# Allegro board max10_dk_c.brd
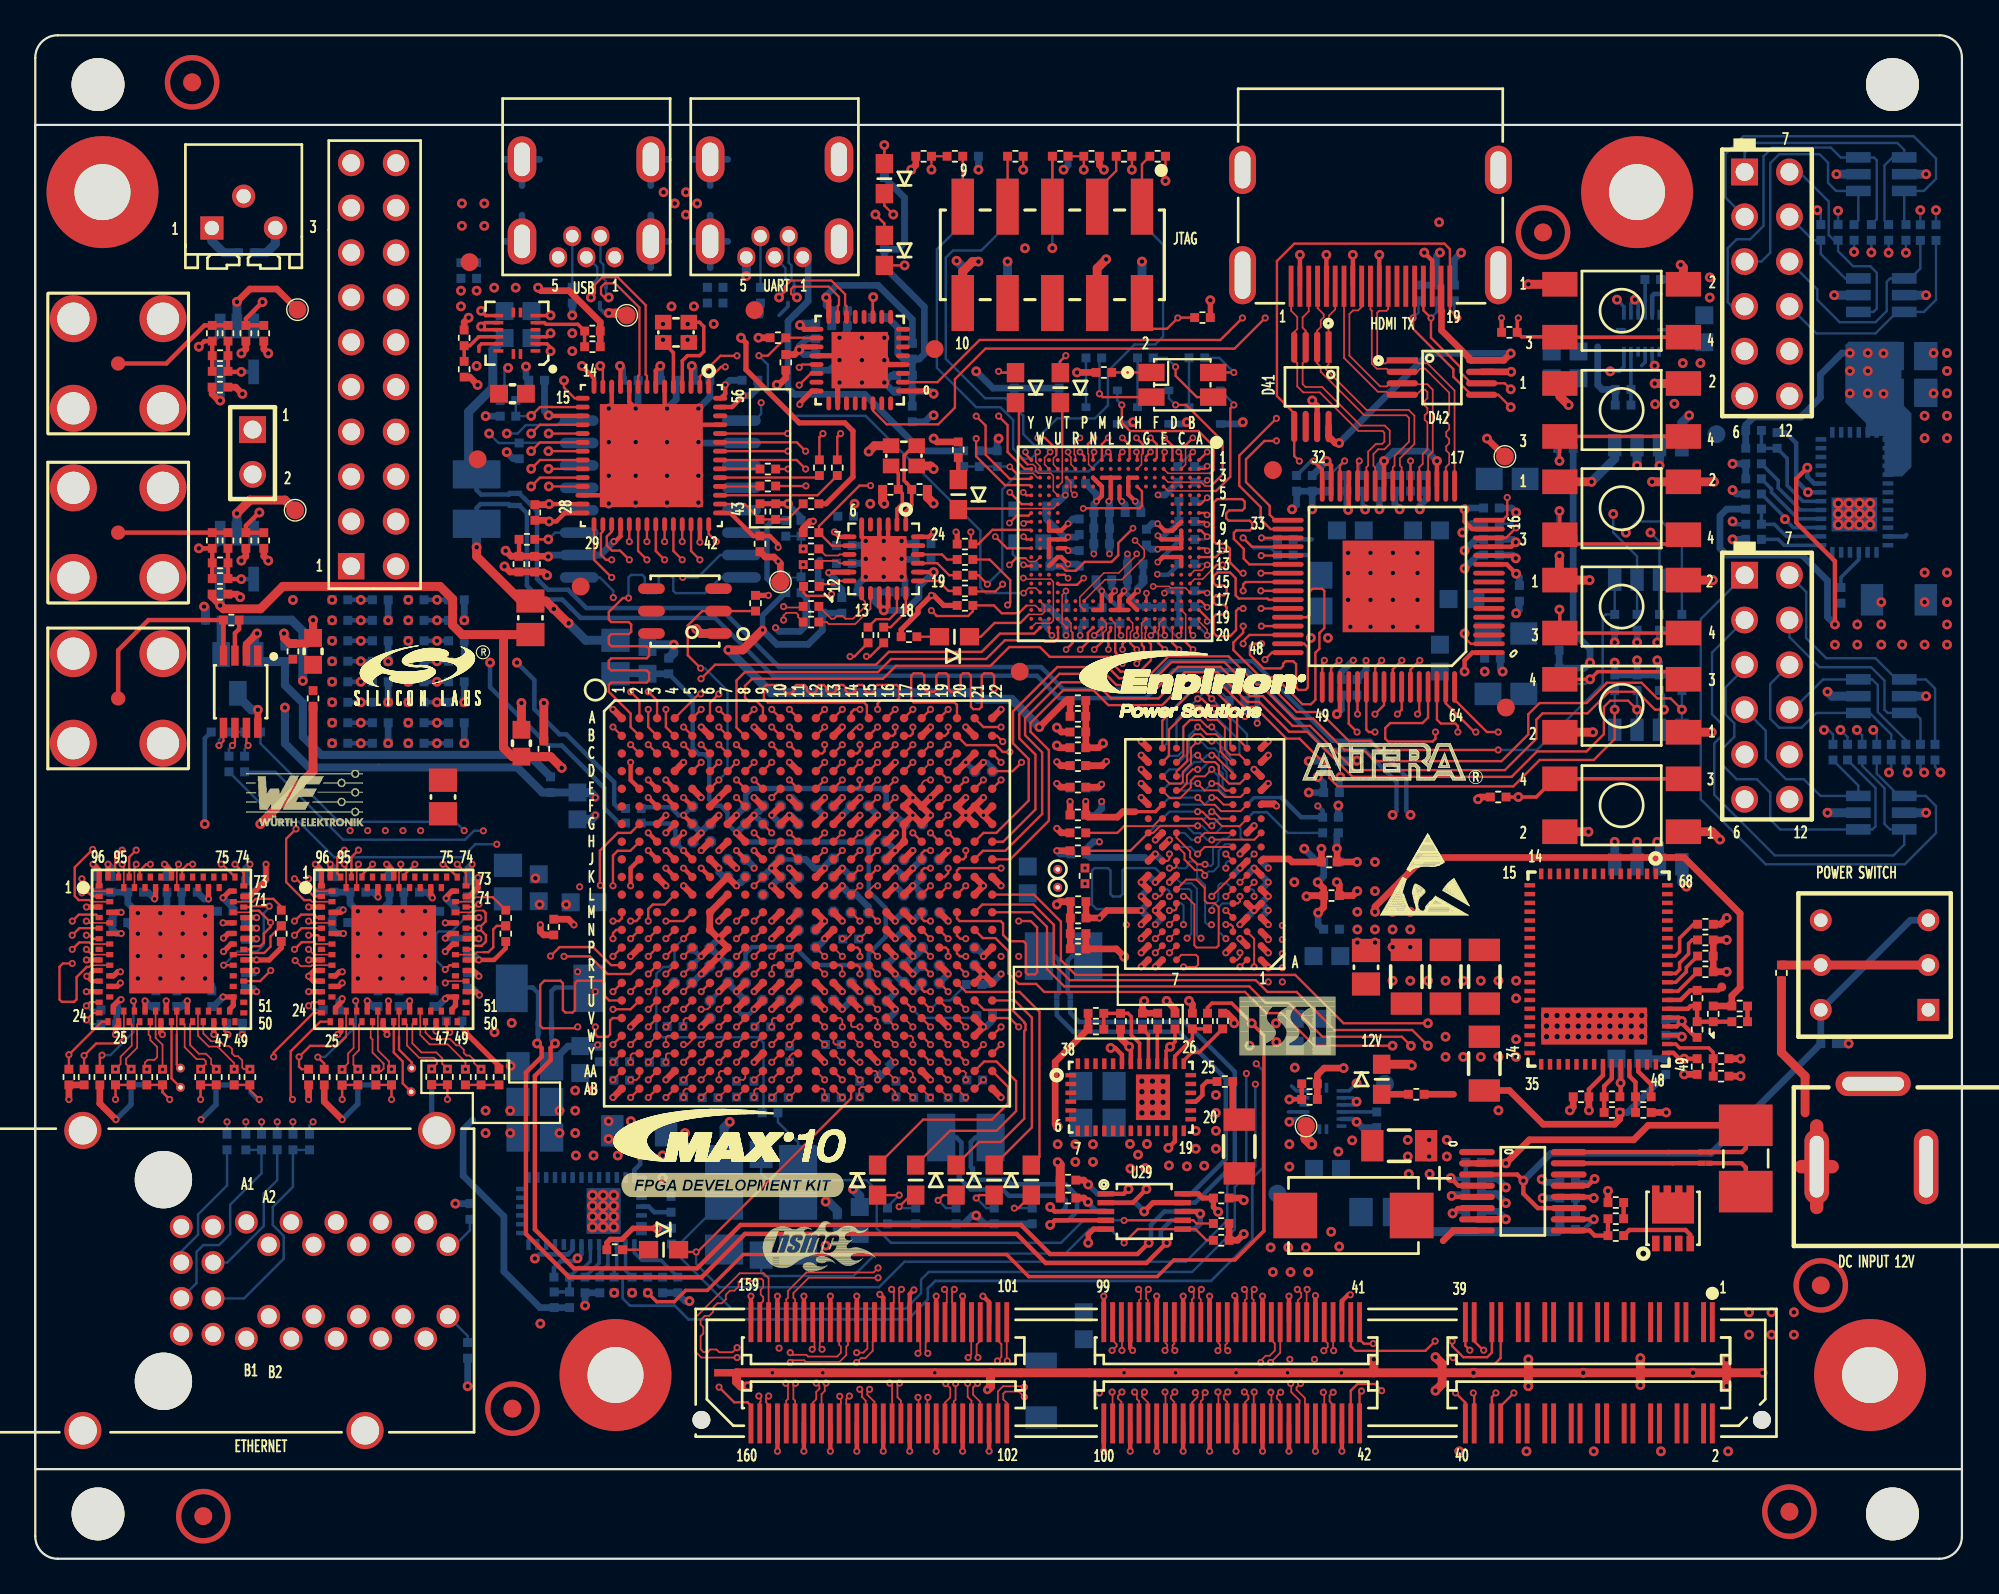
[diagram p0: board, top side]
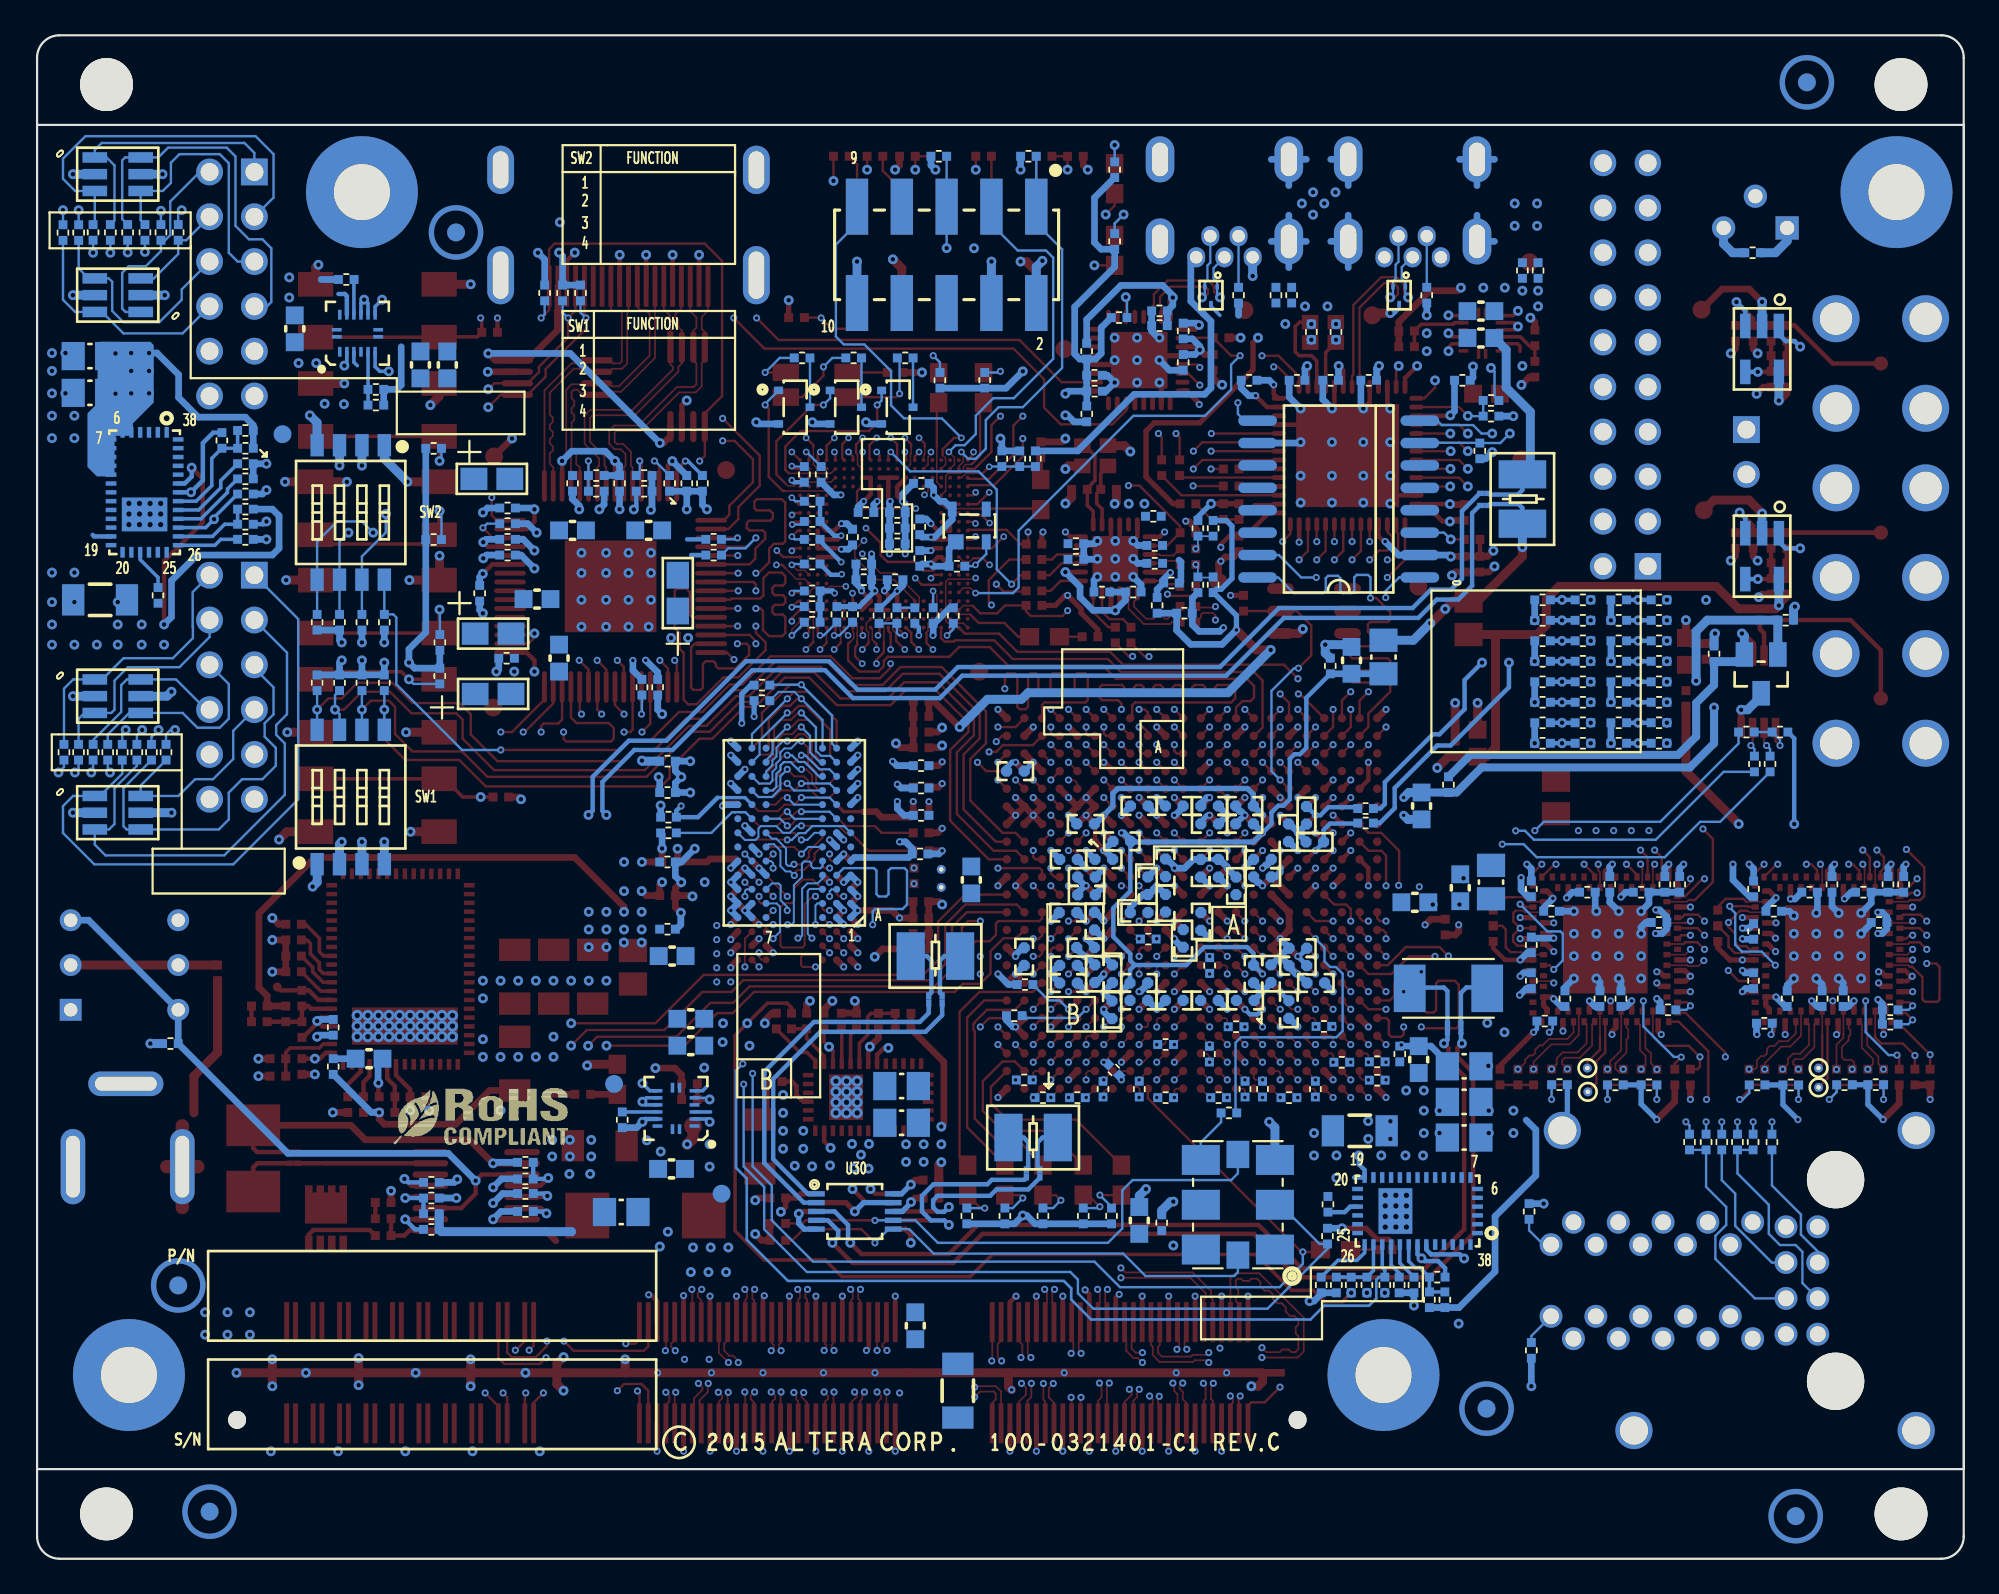
[diagram p1: board, bottom side, seen from below]

Outline 109.22 x 86.36 mm; copper layers: TOP, GND02, ART03, ART04, PWR05, GND06, ART07, ART08, POWER09, BOTTOM. Coordinates in mm from the lower left corner of the outline.
Outline path: rectangle 109.22,81.28 0,5.08 ; 0,81.28 0,85.09 arc(0.37,85.99) 1.27,86.36 107.95,86.36 arc(108.85,85.99) 109.22,85.09 109.22,5.08 ; 0,81.28 0,5.08 ; 0,81.28 109.22,81.28 ; 0,5.08 109.22,5.08 ; 0,5.08 0,1.27 arc(0.37,0.37) 1.27,0 107.95,0 arc(108.85,0.37) 109.22,1.27 109.22,5.08

## Design rules (mm)
net group DIFFPAIR3: nets CLK_DDR3_100_CN CLK_DDR3_100_CP
net group DIFFPAIR4: nets CLK_LVDS_125_CN CLK_LVDS_125_CP
net group DIFFPAIR10: nets FT232_DM FT232_DP
net group DIFFPAIR11: nets TMDS_CLK_N TMDS_CLK_P
net group DIFFPAIR54: nets ENETB_MDI_N3 ENETB_MDI_P3
net group DP_FX2_D_: nets FX2_D_N FX2_D_P
net group PMODA_D0: nets PMODA_D0 PMODA_IO0
net group PMODA_D1: nets PMODA_D1 PMODA_IO1
net group PMODA_D2: nets PMODA_D2 PMODA_IO2
net group PMODA_D3: nets PMODA_D3 PMODA_IO3
net group PMODA_D4: nets PMODA_D4 PMODA_IO4
net group PMODA_D5: nets PMODA_D5 PMODA_IO5
net group PMODA_D6: nets PMODA_D6 PMODA_IO6
net group PMODA_D7: nets PMODA_D7 PMODA_IO7
net group PMODB_D0: nets PMODB_D0 PMODB_IO0
net group PMODB_D1: nets PMODB_D1 PMODB_IO1
net group PMODB_D2: nets PMODB_D2 PMODB_IO2
net group PMODB_D3: nets PMODB_D3 PMODB_IO3
net group PMODB_D4: nets PMODB_D4 PMODB_IO4
net group PMODB_D5: nets PMODB_D5 PMODB_IO5
net group PMODB_D6: nets PMODB_D6 PMODB_IO6
net group PMODB_D7: nets PMODB_D7 PMODB_IO7
net group USB: nets UART_RX UART_TX
net group USB_ADDR: nets USB_ADDR0 USB_ADDR1
net group DIFF_1.0BGA: nets CLK_DDR3_100_N CLK_DDR3_100_P CLK_LVDS_125_N CLK_LVDS_125_P DDR3_CLK_N DDR3_CLK_P DDR3_DQS_N0 DDR3_DQS_P0 HSMC_CLK_IN_N1 HSMC_CLK_IN_N2 HSMC_CLK_IN_P1 HSMC_CLK_IN_P2 HSMC_CLK_OUT_N1 HSMC_CLK_OUT_N2 HSMC_CLK_OUT_P1 HSMC_CLK_OUT_P2 HSMC_RX_D_N0 HSMC_RX_D_N1 HSMC_RX_D_N2 HSMC_RX_D_N3 HSMC_RX_D_N4 HSMC_RX_D_N5 HSMC_RX_D_N6 HSMC_RX_D_N7 HSMC_RX_D_N8 HSMC_RX_D_N9 HSMC_RX_D_N10 HSMC_RX_D_N11 HSMC_RX_D_N12 HSMC_RX_D_N13 HSMC_RX_D_N14 HSMC_RX_D_N15 HSMC_RX_D_N16 HSMC_RX_D_P0 HSMC_RX_D_P1 HSMC_RX_D_P2 HSMC_RX_D_P3 HSMC_RX_D_P4 HSMC_RX_D_P5 HSMC_RX_D_P6 HSMC_RX_D_P7 HSMC_RX_D_P8 HSMC_RX_D_P9 HSMC_RX_D_P10 HSMC_RX_D_P11 HSMC_RX_D_P12 HSMC_RX_D_P13 HSMC_RX_D_P14 HSMC_RX_D_P15 HSMC_RX_D_P16 HSMC_TX_D_N0 HSMC_TX_D_N1 HSMC_TX_D_N2 HSMC_TX_D_N3 HSMC_TX_D_N4 HSMC_TX_D_N5 HSMC_TX_D_N6 HSMC_TX_D_N7 HSMC_TX_D_N8 HSMC_TX_D_N9 HSMC_TX_D_N10 HSMC_TX_D_N11 HSMC_TX_D_N12 HSMC_TX_D_N13 HSMC_TX_D_N14 HSMC_TX_D_N15 HSMC_TX_D_N16 HSMC_TX_D_P0 HSMC_TX_D_P1 HSMC_TX_D_P2 HSMC_TX_D_P3 HSMC_TX_D_P4 HSMC_TX_D_P5 HSMC_TX_D_P6 HSMC_TX_D_P7 HSMC_TX_D_P8 HSMC_TX_D_P9 HSMC_TX_D_P10 HSMC_TX_D_P11 HSMC_TX_D_P12 HSMC_TX_D_P13 HSMC_TX_D_P14 HSMC_TX_D_P15 HSMC_TX_D_P16
net group ENETA_MDI: nets ENETA_MDI_N0 ENETA_MDI_N1 ENETA_MDI_N2 ENETA_MDI_N3 ENETA_MDI_P0 ENETA_MDI_P1 ENETA_MDI_P2 ENETA_MDI_P3
net group ENETB_MDI: nets ENETB_MDI_N0 ENETB_MDI_N1 ENETB_MDI_N2 ENETB_MDI_P0 ENETB_MDI_P1 ENETB_MDI_P2
net group JTAG: nets MAX10_JTAG_EN MAX10_JTAG_TCK MAX10_JTAG_TDI MAX10_JTAG_TDO MAX10_JTAG_TMS
net group QSPI: nets QSPI_CLK QSPI_CSN QSPI_IO0 QSPI_IO1 QSPI_IO2 QSPI_IO3
net group TMD_DATA: nets TMDS_DATA_N0 TMDS_DATA_N1 TMDS_DATA_N2 TMDS_DATA_P0 TMDS_DATA_P1 TMDS_DATA_P2
net group USB_DATA: nets USB_DATA0 USB_DATA1 USB_DATA2 USB_DATA3 USB_DATA4 USB_DATA5 USB_DATA6 USB_DATA7

## Placement (name value [footprint] x y rotation side)
C1  10uF  [0603]  46.74 19.18 90 bottom
C2  0.1uF  [0402]  45.47 19.05 0 bottom
C3  DNI  [0402]  50.13 60.62 270 top
C4  0.1uF  [0402]  48.86 54.8 270 bottom
C5  0.1uF  [0402]  50.33 56.65 90 bottom
C6  0.1uF  [0402]  50.33 57.54 90 bottom
C7  0.1uF  [0402]  45.86 56.43 270 bottom
C8  0.1uF  [0402]  45.86 57.44 270 bottom
C9  0.1uF  [0402]  47.08 54.8 90 bottom
C10  DNI  [0402]  48.48 60.62 90 top
C11  0.1uF  [0402]  43.98 57.25 270 top
C12  0.1uF  [0402]  43.98 56.36 270 top
C13  0.1uF  [0402]  43.98 53.99 270 top
C14  0.1uF  [0402]  43.98 53.1 270 top
C15  1pF  [0402]  23.88 49.71 270 bottom
C16  1pF  [0402]  19.56 53.19 270 bottom
C17  1pF  [0402]  23.88 47.39 270 bottom
C18  1pF  [0402]  23.88 46.23 270 bottom
C19  1pF  [0402]  23.88 52.03 270 bottom
C20  1pF  [0402]  23.88 53.19 270 bottom
C21  1pF  [0402]  23.88 50.87 270 bottom
C22  1pF  [0402]  23.88 48.55 270 bottom
C23  1pF  [0402]  19.56 47.39 270 bottom
C24  1pF  [0402]  23.88 54.36 270 bottom
C25  1pF  [0402]  19.56 50.87 270 bottom
C26  1pF  [0402]  19.56 52.03 270 bottom
C27  1pF  [0402]  19.56 48.55 270 bottom
C28  1pF  [0402]  19.56 46.23 270 bottom
C29  1pF  [0402]  19.56 49.71 270 bottom
C30  1pF  [0402]  19.56 54.36 270 bottom
C31  0.1uF  [0402]  14.6 51.43 180 top
C32  10uF  [0603]  15.75 51.43 90 top
C33  0.47uF  [0402]  10.09 53.21 90 bottom
C34  0.1uF  [0402]  14.15 51.3 0 bottom
C49  0.1uF  [0402]  73.43 42.04 270 bottom
C64  0.1uF  [0402]  59.11 42.16 270 top
C65  4.7uF  [0402]  27.42 56.38 180 top
C66  0.1uF  [0402]  28.31 56.38 0 top
C67  10uF  [1206]  57.02 9.52 90 bottom
C68  10uF  [0603]  59.44 13.21 270 bottom
C69  4.7uF  [0402]  11.97 74.03 270 bottom
C70  DNI  [0402]  24.31 69.21 0 top
C71  10uF  [0603]  79.63 51.05 90 bottom
C72  0.1uF  [0402]  84.13 54.73 180 bottom
C73  0.1uF  [0402]  72.39 60.96 180 bottom
C74  0.1uF  [0402]  74.04 49.4 0 bottom
C75  0.1uF  [0402]  82.61 51.05 270 bottom
C76  10uF  [0603]  80.88 54.4 180 bottom
C77  0.1uF  [0402]  82.55 56.9 90 bottom
C78  0.1uF  [0402]  82.55 57.78 90 bottom
C79  10uF  [0603]  78.87 58.29 180 bottom
C80  0.1uF  [0402]  82.55 59.56 270 bottom
C81  0.1uF  [0402]  78.87 60.96 180 bottom
C82  0.1uF  [0402]  76.2 60.96 180 bottom
C83  10uF  [0603]  74.55 58.29 0 bottom
C84  0.1uF  [0402]  74.8 60.52 270 bottom
C85  0.01uF  [0402]  4.99 26.87 90 bottom
C86  0.01uF  [0402]  6.76 26.87 270 bottom
C87  0.01uF  [0402]  9.8 26.86 90 bottom
C88  0.01uF  [0402]  11.71 26.86 270 bottom
C89  0.1uF  [0402]  4.29 38.23 180 bottom
C90  0.1uF  [0402]  5.69 37.78 90 bottom
C91  0.1uF  [0402]  8.74 37.78 90 bottom
C92  0.1uF  [0402]  6.83 31.75 0 bottom
C93  0.1uF  [0402]  8.03 31.75 0 bottom
C94  0.1uF  [0402]  10.77 36.7 90 bottom
C95  0.1uF  [0402]  11.91 35.56 0 bottom
C96  0.1uF  [0402]  10.01 31.75 0 bottom
C97  0.1uF  [0402]  11.91 37.97 0 bottom
C98  0.1uF  [0402]  3.4 38.23 180 bottom
C99  0.1uF  [0402]  7.47 38.23 180 bottom
C100  0.1uF  [0402]  4.8 36.07 270 bottom
C101  0.1uF  [0402]  11.91 32.77 180 bottom
C102  0.01uF  [0402]  17.84 26.86 90 bottom
C103  0.01uF  [0402]  19.75 26.86 270 bottom
C104  0.01uF  [0402]  22.92 26.87 270 bottom
C105  0.01uF  [0402]  26.29 27.3 0 top
C106  0.1uF  [0402]  22.61 31.75 0 bottom
C107  0.1uF  [0402]  20.62 31.75 0 bottom
C108  0.1uF  [0402]  24.51 34.8 0 bottom
C109  0.1uF  [0402]  19.43 31.75 0 bottom
C110  0.1uF  [0402]  23.37 36.7 90 bottom
C111  0.1uF  [0402]  21.34 37.78 90 bottom
C112  0.1uF  [0402]  16.94 38.23 180 bottom
C113  0.1uF  [0402]  18.29 37.78 90 bottom
C114  0.1uF  [0402]  24.51 32.77 180 bottom
C115  0.1uF  [0402]  20.07 38.23 180 bottom
C116  0.1uF  [0402]  24.51 37.97 0 bottom
C117  0.1uF  [0402]  16.1 38.23 180 bottom
C118  0.1uF  [0402]  17.27 36.07 270 bottom
C119  0.1uF  [0402]  49.28 67.08 90 bottom
C120  4.7uF  [0402]  49.27 66.18 90 bottom
C121  0.1uF  [0402]  45.59 69.9 270 bottom
C122  4.7uF  [0402]  45.59 70.74 270 bottom
C123  0.1uF  [0402]  44.25 67.82 180 bottom
C124  4.7uF  [0402]  44.25 69.6 0 bottom
C125  4.7nF  [0402]  25.02 73.02 0 bottom
C126  0.1uF  [0402]  59.09 60.96 90 bottom
C127  4.7nF  [0402]  38.99 71.63 180 bottom
C128  12pF  [0402]  35.59 69.55 0 bottom
C129  12pF  [0402]  36.98 69.55 180 bottom
C130  0.1uF  [0402]  41.08 59.36 180 top
C131  0.1uF  [0402]  67.23 20.45 90 top
C132  0.1uF  [0402]  33.73 66.8 270 bottom
C133  0.1uF  [0402]  40.51 66.8 90 bottom
C134  0.1uF  [0402]  41.08 57.53 0 top
C135  0.1uF  [0402]  28.32 59.31 0 top
C136  0.1uF  [0402]  37.8 66.8 270 bottom
C137  0.1uF  [0402]  28.42 66.8 90 bottom
C138  0.1uF  [0402]  35.89 66.8 270 bottom
C139  DNI  [0402]  59.46 53.47 180 bottom
C140  0.1uF  [0402]  62.99 57.91 0 bottom
C141  0.1uF  [0402]  62.23 59.31 270 bottom
C142  0.1uF  [0402]  60.45 59.31 90 bottom
C143  0.1uF  [0402]  62.36 55.5 270 bottom
C144  0.1uF  [0402]  60.58 55.5 90 bottom
C145  0.1uF  [0402]  59.18 56.71 180 bottom
C146  0.1uF  [0402]  59.18 58.5 0 bottom
C147  0.1uF  [0402]  62.36 56.39 270 bottom
C148  0.1uF  [0402]  60.45 57.53 90 bottom
C149  0.1uF  [0402]  60.45 58.42 90 bottom
C150  DNI  [0603]  90.4 28.35 180 bottom
C151  0.22uF  [0402]  91.16 26.19 90 top
C152  22nF  [0402]  89.38 26.19 90 top
C153  22uF  [1206]  82.14 28.07 270 top
C154  56pF  [0402]  96.62 31.33 270 top
C155  47uf  [1206]  77.72 32.99 270 top
C156  47uf  [1206]  79.93 32.99 270 top
C157  DNI  [1206]  82.14 32.99 270 top
C158  150uF  [7343P]  74.73 19.46 180 top
C159  1uF  [0402]  87.63 26.19 270 top
C160  1uF  [0402]  92.43 30.12 0 bottom
C161  22uF  [1206]  77.32 23.41 0 top
C162  0.1uF  [0402]  81.53 20.7 270 bottom
C163  0.1uF  [0402]  81.53 19.68 270 bottom
C164  0.01uF  [0402]  89.6 20.19 90 top
C165  0.047uF  [0402]  94.68 33.27 90 top
C166  DNI  [0402]  35.57 15.52 0 bottom
C168  22uF  [1206]  105.65 54.36 180 bottom
C169  47UF  [0805]  106.22 66.09 270 bottom
C170  22uF  [1206]  68.25 23.37 90 top
C171  47UF  [0805]  106.22 68.17 270 bottom
C172  47UF  [0805]  60.21 24.71 270 bottom
C173  47UF  [0805]  60.21 26.79 270 bottom
C174  15pF  [0402]  97.41 63.96 90 bottom
C175  15pF  [0402]  60.13 30.03 270 top
C176  22nF  [0402]  97.41 62.07 270 bottom
C177  22nF  [0402]  62.77 30.48 0 top
C178  10uF  [0603]  34.71 50.93 90 bottom
C179  0.1uF  [0402]  35.91 50.61 0 bottom
C180  10uF  [0603]  27.56 46.23 90 top
C181  0.1uF  [0402]  28.83 45.91 180 top
C182  0.1uF  [C0402_BGA]  53.26 34.13 270 bottom
C183  0.1uF  [0402]  10.47 66.41 90 top
C184  0.1uF  [0402]  10.47 54.68 90 top
C196  10uF  [0603]  30.9 28.3 270 bottom
C197  0.1uF  [0402]  31.97 28.61 180 bottom
C198  10uF  [0603]  28.54 38.04 270 bottom
C199  0.1uF  [C0402_BGA]  39.76 39.64 0 bottom
C200  22uF  [1206]  34.24 24.26 0 bottom
C201  2.2uF  [0603]  73.25 22.1 180 bottom
C202  10uF  [0603]  72.16 29.08 180 bottom
C203  47UF  [0805]  28.32 25.9 270 bottom
C204  47UF  [0805]  28.32 23.88 270 bottom
C205  15pF  [0402]  29.41 14.68 180 bottom
C206  22nF  [0402]  31.17 15.52 0 bottom
C207  30pF  [0402]  10.48 55.56 270 top
C208  30pF  [0402]  10.48 67.31 270 top
C209  0.1uF  [0402]  58.55 21.46 270 top
C210  0.1uF  [0402]  58.55 20.45 270 top
C211  10uF  [0603]  72.16 30.61 180 bottom
C212  0.1uF  [0402]  54.53 62.36 0 bottom
C213  DNI  [0402]  31.58 69.6 270 top
C214  2.2uF  [0603]  27.05 66.04 0 top
C215  10uF  [0603]  27.37 70.72 0 bottom
C216  4.7uF  [C0402_BGA]  42.25 39.14 90 bottom
C217  10uF  [0603]  27.37 69.2 0 bottom
C218  2.2uF  [0603]  94.62 69.72 270 bottom
C219  1.0UF  [C0402_BGA]  45.25 37.16 90 bottom
C220  1.0UF  [C0402_BGA]  44.25 35.16 270 bottom
C221  1.0UF  [C0402_BGA]  46.25 38.15 270 bottom
C222  1.0UF  [C0402_BGA]  43.26 39.14 90 bottom
C223  1.0UF  [C0402_BGA]  46.75 36.63 0 bottom
C224  1.0UF  [C0402_BGA]  45.25 39.17 90 bottom
C225  1.0UF  [C0402_BGA]  43.25 36.13 270 bottom
C226  0.1uF  [C0402_BGA]  40.77 41.66 180 bottom
C227  0.1uF  [C0402_BGA]  47.73 40.67 180 bottom
C228  0.1uF  [C0402_BGA]  46.76 32.64 0 bottom
C229  0.1uF  [C0402_BGA]  40.26 33.15 90 bottom
C230  1.0UF  [C0402_BGA]  41.25 38.14 90 bottom
C231  DNI  [0402]  90.01 66.29 270 bottom
C232  0.1uF  [C0402_BGA]  48.29 31.11 270 bottom
C233  0.1uF  [C0402_BGA]  49.78 41.66 180 bottom
C234  0.1uF  [C0402_BGA]  40.77 42.67 180 bottom
C235  0.1uF  [C0402_BGA]  38.26 31.13 90 bottom
C236  0.1uF  [0402]  59.11 44.96 270 bottom
C237  0.1uF  [0402]  73.48 43.43 90 bottom
C238  0.1uF  [0402]  59.11 44.96 90 top
C239  0.1uF  [0402]  59.11 43.69 270 bottom
C240  0.1uF  [0402]  73.48 37.59 270 top
C241  0.1uF  [0402]  59.11 43.74 90 top
C242  DNI  [0402]  72.24 26.04 270 top
C246  0.1uF  [C0402_BGA]  48.26 33.16 90 bottom
C247  0.1uF  [C0402_BGA]  49.26 33.16 270 bottom
C248  0.1uF  [C0402_BGA]  50.75 32.63 180 bottom
C249  0.1uF  [C0402_BGA]  49.28 36.14 270 bottom
C250  0.1uF  [C0402_BGA]  50.75 33.63 180 bottom
C251  0.1uF  [C0402_BGA]  49.78 34.65 180 bottom
C255  10uF  [0603]  85.96 67.68 270 bottom
C256  10uF  [0603]  87.49 67.68 270 bottom
C308  1.0UF  [C0402_BGA]  44.75 42.67 0 bottom
C309  0.1uF  [C0402_BGA]  46.74 42.67 180 bottom
C310  0.1uF  [C0402_BGA]  42.75 42.67 0 bottom
C311  1.0UF  [C0402_BGA]  40.73 31.65 180 bottom
C312  1.0UF  [C0402_BGA]  42.76 31.65 180 bottom
C313  0.1uF  [C0402_BGA]  37.74 34.61 0 bottom
C314  1uF  [C0402_BGA]  38.28 41.15 90 bottom
C315  10uF  [0603]  30.73 42.67 270 bottom
C316  0.1uF  [C0402_BGA]  39.76 38.65 180 bottom
C318  1pF  [C0402-BGA]  37.26 42.15 270 bottom
C319  1pF  [C0402-BGA]  36.78 40.63 0 bottom
C324  DNI  [0402]  59.11 48.64 90 top
C325  0.1uF  [0402]  59.11 45.97 270 top
C326  0.1uF  [0402]  59.16 39.95 90 bottom
C327  0.1uF  [0402]  73.36 39.5 90 top
C328  0.1uF  [C0402_BGA]  39.27 33.16 90 bottom
C329  0.1uF  [0402]  59.12 37.25 90 top
C330  DNI  [0402]  59.12 34.57 270 top
C331  0.1uF  [C0402_BGA]  53.76 44.65 180 bottom
C334  10uF  [0603]  73.22 34.16 0 bottom
C335  10uF  [0603]  56.26 38.48 90 bottom
C340  0.1uF  [C0402_BGA]  46.76 31.65 0 bottom
C341  10uF  [0603]  31.11 37.21 180 bottom
C342  0.1uF  [C0402_BGA]  37.74 33.62 0 bottom
C343  1.0UF  [C0402_BGA]  42.75 41.66 180 bottom
C344  1.0UF  [C0402_BGA]  36.73 32.64 180 bottom
C345  1.0UF  [C0402_BGA]  44.75 31.65 0 bottom
C346  1.0UF  [C0402_BGA]  49.73 37.63 0 bottom
C347  1.0UF  [C0402_BGA]  49.73 38.64 0 bottom
C348  1.0UF  [C0402_BGA]  50.75 39.64 0 bottom
C349  1.0UF  [C0402_BGA]  48.75 39.65 180 bottom
C350  1.0UF  [C0402_BGA]  50.77 36.63 0 bottom
C351  1.0UF  [0402]  73.48 45.21 270 bottom
C352  1.0UF  [0402]  73.48 35.69 270 bottom
C353  1.0UF  [0402]  59.11 42.14 90 bottom
C354  1.0UF  [0402]  73.48 39.5 270 bottom
C355  0.1uF  [0402]  44.18 53.6 90 bottom
D1  BLUE LED  [BLUE_LED_0603]  76.33 27.18 90 top
D2  GREEN_LED  [LED_0603]  35.62 17.52 0 top
D13  GREEN_LED  [LED_0603]  48.13 74.17 270 top
D14  GREEN_LED  [LED_0603]  48.13 78.23 270 top
D15  GREEN_LED  [LED_0603]  56.46 21.46 90 top
D16  GREEN_LED  [LED_0603]  54.36 21.46 90 top
D17  GREEN_LED  [LED_0603]  52.2 21.46 90 top
D18  GREEN_LED  [LED_0603]  49.91 21.46 90 top
D19  GREEN_LED  [LED_0603]  47.75 21.46 90 top
D20  GREEN_LED  [LED_0603]  52.11 52.27 0 top
D21  GREEN_LED  [LED_0603]  58.11 66.38 270 top
D22  GREEN_LED  [LED_0603]  55.57 66.38 270 top
D23  GREEN_LED  [LED_0603]  52.32 60.32 270 top
D41  82401646  [WURTH_MSOP8]  72.34 66.43 180 top
D42  82401646  [WURTH_MSOP8]  79.75 66.96 270 top
J1  SMA  [SMA_LTI-SASF546-P26-X1]  4.7 48.77 180 top
J2  HSMC  [SAMTEC_QSHDP120CUSTOM]  68.07 10.54 180 top
J4  2x6 PMOD Connector  [HDR2X6_100MIL]  96.9 55.75 0 top
J5  2x6 PMOD Connector  [HDR2X6_100MIL]  96.9 78.61 0 top
J7  CON2  [HDR2X1_100MIL]  12.32 64.01 270 top
J8  685119134923  [HDMI-19PIN]  75.69 72.14 270 top
J11  USB MINI-B  [WURTH_USB_MINI-B]  41.91 74.68 180 top
J12  USB MINI-B  [WURTH_USB_MINI-B]  31.24 74.68 180 top
J13  DNI  [HDR2X5_100MIL_SMT]  60.2 73.91 270 bottom
J14  2X5_100mil  [HDR2X5_100MIL_SMT]  55.12 73.91 270 top
J15  DC Input Jack 2.0 mm  [JACK-DC_2MM]  107.19 22.22 270 top
J18  SMA  [SMA_LTI-SASF546-P26-X1]  4.7 58.17 90 top
J19  SMA  [SMA_LTI-SASF546-P26-X1]  4.7 67.75 0 top
J20  2x10 Header  [HDR2X10_100MIL]  17.91 56.26 90 top
L1  BLM15AG221SN1  [0402]  45.94 59.09 270 bottom
L2  10uH  [0806]  83.37 49.02 90 bottom
L3  10uH  [0806]  83.37 52.44 90 bottom
L4  10uH  [0806]  83.44 61.21 90 bottom
L5  10uH  [0806]  72.9 54.74 0 bottom
L6  742792022  [0805]  32.89 51.11 180 bottom
L7  742792022  [0805]  28.07 53.34 0 top
L8  742792022  [0805]  28.32 27.91 270 bottom
L9  742792022  [0805]  26.8 38.36 0 bottom
L10  BLM15AG221SN1  [0402]  15.75 48.77 0 top
L11  742792022  [0805]  23.11 43.18 0 top
L12  BLM15AG221SN1  [0402]  29.39 35.81 0 top
LED1  RGB_LED_HSMF_C118  [HSMF-C118]  65.02 66.55 180 top
NOREF  -  [unnamed]  83.37 48.25 180 top
NOREF#2  -  [unnamed#2]  104.01 10.41 90 top
NOREF#3  -  [unnamed]  99.44 2.67 180 top
NOREF#4  -  [#3]  -406.93 -189.44 0 top
NOREF#5  -  [unnamed#2]  105.28 83.57 180 top
NOREF#6  -  [unnamed]  40.77 70.78 180 top
NOREF#7  -  [unnamed]  85.47 75.18 180 top
NOREF#8  -  [unnamed]  27.05 8.51 180 top
NOREF#9  -  [unnamed]  24.62 73.5 180 top
NOREF#10  -  [#3]  -393.69 -171.48 0 top
NOREF#11  -  [unnamed#2]  3.56 2.54 180 top
NOREF#12  -  [unnamed#2]  3.56 83.57 180 top
NOREF#13  -  [unnamed]  55.81 50.28 180 top
NOREF#14  -  [unnamed#2]  32.89 10.41 90 top
NOREF#15  -  [unnamed#2]  90.81 77.47 270 top
NOREF#16  -  [unnamed#2]  105.28 2.54 180 top
NOREF#17  -  [unnamed]  70.16 61.71 180 top
NOREF#18  -  [unnamed]  9.52 2.41 180 top
NOREF#19  -  [unnamed#2]  3.81 77.47 180 top
NOREF#20  -  [unnamed]  8.89 83.69 180 top
NOREF#21  -  [#3]  0 5.08 90 top
NOREF#22  -  [unnamed]  30.92 55.11 180 top
NOREF#23  -  [unnamed]  25.07 62.32 180 top
NOREF#24  -  [#3]  0 81.28 0 top
NOREF#25  -  [unnamed]  101.22 15.49 180 top
NOREF#26  -  [unnamed]  50.98 68.57 180 top
NOREF#27  -  [unnamed]  70.41 20.69 0 bottom
NOREF#28  -  [unnamed]  9.52 2.41 0 bottom
NOREF#29  -  [unnamed]  76.51 26.92 0 bottom
NOREF#30  -  [unnamed]  95.31 63.75 0 bottom
NOREF#31  -  [unnamed]  99.44 2.67 0 bottom
NOREF#32  -  [unnamed]  27.05 8.51 0 bottom
NOREF#33  -  [unnamed]  8.89 83.69 0 bottom
NOREF#34  -  [unnamed]  85.47 75.18 0 bottom
NOREF#35  -  [unnamed]  101.22 15.49 0 bottom
POT1  500  [POTTATH]  10.01 75.44 0 top
Q1  NDS7002A  [SOT23]  60.45 65.28 180 bottom
Q2  NDS7002A  [SOT23]  63.37 65.28 180 bottom
Q3  NDS7002A  [SOT23]  66.29 65.28 180 bottom
R1  49.9  [0402]  53.21 32.55 90 bottom
R2  49.9  [0402]  53.82 30.78 90 bottom
R6  10K  [0402]  52.7 57.52 270 top
R7  4.7k  [0402]  36.07 18.29 180 bottom
R8  10K  [0402]  52.7 54.04 270 top
R10  4.7k  [0402]  43.98 58.17 270 top
R15  10  [0402]  21.59 49.71 90 bottom
R16  10  [0402]  17.27 53.19 90 bottom
R17  10  [0402]  21.59 47.39 90 bottom
R18  10  [0402]  21.59 46.23 90 bottom
R19  10  [0402]  21.59 52.03 90 bottom
R20  10  [0402]  21.59 53.19 90 bottom
R21  10  [0402]  21.59 50.87 90 bottom
R22  10  [0402]  21.59 48.55 90 bottom
R23  10  [0402]  17.27 47.39 90 bottom
R24  10  [0402]  21.59 54.36 90 bottom
R25  10  [0402]  17.27 50.87 90 bottom
R26  10  [0402]  17.27 52.03 90 bottom
R27  10  [0402]  17.27 48.55 90 bottom
R28  10  [0402]  17.27 46.23 90 bottom
R29  10  [0402]  17.27 49.71 90 bottom
R30  10  [0402]  17.27 54.36 90 bottom
R31  DNI  [0402]  10.41 46.86 90 bottom
R33  100  [0402]  42.75 33.63 180 bottom
R34  0  [0402]  12.32 46.86 90 bottom
R35  0  [0402]  11.11 53.21 270 top
R36  0  [0402]  10.98 45.05 0 bottom
R37  0  [0402]  11.87 45.05 0 bottom
R38  240  [0402]  59.11 41.15 270 top
R39  240  [0402]  73.43 41.15 270 bottom
R40  1.00K  [0402]  59.11 47.75 270 top
R41  100  [0402]  59.51 38.71 0 top
R42  1.00K  [0402]  59.11 46.86 90 top
R43  2.0K  [0402]  27.87 57.78 270 top
R44  10K  [0402]  78.29 26.33 90 top
R45  49.9  [0402]  32.85 17.52 90 top
R46  2.0K  [0402]  79.43 71.75 0 bottom
R47  2.0K  [0402]  78.41 71.75 0 bottom
R48  10.0K  [0402]  80.45 71.75 0 bottom
R49  DNI  [0402]  74.93 49.4 180 bottom
R51  887 1%  [0402]  82.55 58.67 270 bottom
R52  100  [0402]  46.23 35.13 270 bottom
R53  2.0K  [0402]  70.87 56.9 270 bottom
R54  2.0K  [0402]  77.52 60.52 90 bottom
R55  DNI  [0402]  77.52 61.4 270 bottom
R56  DNI  [0402]  65.28 56.39 270 bottom
R57  2.0K  [0402]  70.87 57.78 270 bottom
R58  2.0K  [0402]  74.8 61.4 90 bottom
R59  4.7k  [0402]  4.17 30.3 90 bottom
R60  4.7k  [0402]  1.91 27.3 180 top
R61  4.7k  [0402]  4.17 31.11 90 bottom
R62  4.7k  [0402]  2.77 27.3 180 top
R63  49.9  [0402]  4.55 27.3 180 top
R64  49.9  [0402]  5.44 27.3 180 top
R65  49.9  [0402]  6.32 27.3 180 top
R66  49.9  [0402]  7.21 27.3 180 top
R67  49.9  [0402]  9.37 27.3 180 top
R68  49.9  [0402]  10.26 27.3 180 top
R69  49.9  [0402]  11.28 27.3 180 top
R70  49.9  [0402]  12.17 27.3 180 top
R71  4.99K  [0402]  3.66 27.3 0 top
R72  4.7k  [0402]  11.3 30.35 270 bottom
R73  22.0  [0402]  41.66 25.27 90 bottom
R74  22.0  [0402]  47.21 52.36 0 top
R75  0  [0402]  13.94 36.32 180 top
R76  DNI  [0402]  13.94 35.43 0 top
R77  22.0  [0402]  48.1 52.36 0 top
R78  22.0  [0402]  52.7 55.75 90 top
R79  22.0  [0402]  52.7 56.64 90 top
R80  DNI  [0402]  45.73 54.04 180 bottom
R81  0  [0402]  44.91 55.31 270 bottom
R82  4.7k  [0402]  15.49 27.3 180 top
R83  4.7k  [0402]  16.76 31.11 90 bottom
R84  49.9  [0402]  17.39 27.29 180 top
R85  49.9  [0402]  18.29 27.3 180 top
R86  49.9  [0402]  19.3 27.3 180 top
R87  49.9  [0402]  20.19 27.3 180 top
R88  49.9  [0402]  22.47 27.32 180 top
R89  49.9  [0402]  23.36 27.31 180 top
R90  49.9  [0402]  24.38 27.3 180 top
R91  49.9  [0402]  25.27 27.3 180 top
R92  4.99K  [0402]  16.38 27.3 0 top
R93  4.7k  [0402]  23.75 30.48 270 bottom
R94  DNI  [0402]  53.26 27.14 270 bottom
R95  DNI  [0402]  41.25 30.16 90 bottom
R96  0  [0402]  26.67 36.32 180 top
R97  DNI  [0402]  26.67 35.43 0 top
R98  DNI  [0402]  27.43 62.8 0 bottom
R99  2.0K  [0402]  60.01 68.07 90 bottom
R100  1K  [0402]  62.93 68.07 90 bottom
R101  0  [0402]  49.71 64.9 0 bottom
R102  DNI  [0402]  49.72 68.45 0 bottom
R103  0  [0402]  42.55 67.82 180 top
R104  1K  [0402]  65.85 68.07 90 bottom
R105  4.7k  [0402]  42.1 69.21 90 top
R106  1K  [0402]  60.58 67.25 90 top
R107  DNI  [0402]  41.11 71.63 0 bottom
R108  1M  [0402]  24.13 73.02 180 bottom
R109  270  [0402]  48.13 74.68 0 bottom
R110  270  [0402]  48.13 78.74 0 bottom
R111  10K  [0402]  47.88 70.36 90 bottom
R112  0  [0402]  26.8 65.66 90 bottom
R113  DNI  [0402]  30.44 71.63 180 bottom
R114  1M  [0402]  38.1 71.63 0 bottom
R115  100K  [0402]  57.07 56.26 270 bottom
R116  2.0K  [0402]  64.77 61.47 0 bottom
R117  2.0K  [0402]  26.8 64.77 270 bottom
R118  0  [0402]  45.47 61.85 0 top
R119  0  [0402]  44.45 61.85 0 top
R120  0  [0402]  41.53 61.77 270 top
R121  0  [0402]  41.53 60.81 270 top
R122  10.0K  [0402]  43.98 59.8 270 top
R123  20.0K  [0402]  41.97 59.36 0 top
R124  1.00K  [0402]  53.02 79.5 90 bottom
R125  1.00K  [0402]  58.1 79.5 90 bottom
R126  10.0K  [0402]  65.28 53.97 270 bottom
R127  10.0K  [0402]  65.28 53.09 270 bottom
R128  1.00K  [0402]  65.72 61.47 0 bottom
R129  10.0K  [0402]  65.28 59.94 270 bottom
R130  10.0K  [0402]  65.28 58.8 270 bottom
R131  1.00K  [0402]  65.28 57.78 270 bottom
R132  1.00K  [0402]  58.42 53.47 0 bottom
R133  1.00K  [0402]  57.28 53.47 180 bottom
R134  1.00K  [0402]  62.99 53.53 180 bottom
R135  1.00K  [0402]  63.88 53.53 180 bottom
R136  DNI  [0402]  60.48 53.47 0 bottom
R137  1.00K  [0402]  61.49 53.47 180 bottom
R138  1.00K  [0402]  66.17 70.36 270 top
R139  1.00K  [0402]  59.88 79.5 90 top
R140  1.00K  [0402]  50.36 79.5 270 top
R141  49.9  [0402]  56.52 19.43 0 bottom
R142  10K  [0402]  93.34 49.66 0 bottom
R143  10K  [0402]  92.08 49.66 0 bottom
R144  49.9  [0402]  54.36 19.43 0 bottom
R145  10K  [0402]  90.81 49.66 0 bottom
R146  10K  [0402]  86.39 50.04 0 bottom
R147  10K  [0402]  89.53 49.66 0 bottom
R148  10K  [0402]  86.39 51.94 180 bottom
R149  49.9  [0402]  52.2 19.43 0 bottom
R150  10K  [0402]  86.74 57.78 270 bottom
R151  49.9  [0402]  49.91 19.43 0 bottom
R152  10K  [0402]  86.74 62.94 270 bottom
R153  49.9  [0402]  48.31 19.43 0 bottom
R154  10K  [0402]  89.53 53.09 180 bottom
R155  0  [0402]  73.36 60.96 0 bottom
R156  10K  [0402]  90.81 53.09 180 bottom
R157  10K  [0402]  92.08 53.09 180 bottom
R158  10K  [0402]  93.34 53.09 180 bottom
R159  0  [0402]  71.5 60.96 0 bottom
R160  10K  [0402]  82.93 43.18 270 top
R161  150  [0402]  49.53 52.27 90 top
R162  10K  [0402]  83.57 69.52 270 top
R163  DNI  [0402]  92.43 27.9 0 bottom
R164  560  [0402]  89.38 25.3 90 top
R165  10.0K  [0402]  95.57 27.36 90 top
R166  4.75K  [0402]  91.16 25.3 270 top
R167  22.0  [0402]  43.99 55.12 90 top
R168  75K  [0402]  95.12 30.89 180 top
R169  10.0K  [0402]  94.21 27.9 0 top
R170  10.0K  [0402]  96.62 30.44 90 top
R171  4.02K  [0402]  95.57 28.35 270 top
R172  22.0  [0402]  52.7 54.86 270 top
R174  DNI  [0402]  94.21 31.78 180 top
R176  13.3K  [0402]  94.21 30 180 top
R177  30K  [0402]  94.68 35.08 270 top
R178  68.1K  [0402]  94.68 34.16 90 top
R179  0  [0402]  94.68 35.97 90 top
R181  140K  [0402]  98.99 33.21 180 top
R184  10.0K  [0402]  97.41 60.36 90 bottom
R185  DNI  [0402]  97.41 59.5 90 bottom
R186  10.0K  [0402]  64.61 30.48 180 top
R187  1.00K  [0402]  59.12 35.43 90 top
R188  0.1  [1210]  25.02 60.07 270 bottom
R189  DNI  [0402]  65.6 30.48 180 top
R190  0  [0402]  97.41 58.64 270 bottom
R191  0  [0402]  66.45 30.48 0 top
R192  200k  [0402]  97.41 62.95 90 bottom
R193  200k  [0402]  60.13 30.92 270 top
R194  0  [0402]  97.41 57.78 270 bottom
R195  59.0K  [0402]  98.74 63.39 180 bottom
R196  0  [0402]  67.31 30.48 0 top
R197  84.5K  [0402]  61.52 30.47 180 top
R198  DNI  [0402]  97.41 61.21 270 bottom
R199  DNI  [0402]  63.63 30.48 0 top
R200  560  [0402]  102.36 54.61 0 bottom
R201  560  [0402]  67.44 27.05 270 top
R204  DNI  [0402]  24.51 11.81 0 bottom
R205  DNI  [0402]  24.64 19.68 180 bottom
R206  49.9  [0402]  12.83 23.62 180 bottom
R207  49.9  [0402]  10.87 23.62 180 bottom
R208  49.9  [0402]  14.6 23.62 180 bottom
R209  49.9  [0402]  13.72 23.62 180 bottom
R210  1.00K  [0402]  59.12 36.32 270 top
R211  200  [0402]  104.39 45.72 180 bottom
R212  0.1  [1210]  58.29 34.16 180 bottom
R213  0  [0402]  31.58 68.71 270 top
R214  0  [0402]  90.01 65.4 270 bottom
R215  0  [0402]  72.24 26.92 270 top
R216  200  [0402]  103.56 45.72 180 bottom
R217  200  [0402]  102.74 45.72 180 bottom
R218  200  [0402]  101.91 45.72 180 bottom
R219  200  [0402]  107.7 45.72 180 bottom
R220  200  [0402]  106.87 45.72 180 bottom
R221  20.0K  [0402]  53.52 62.36 180 bottom
R222  10.0K  [0402]  52.63 62.36 180 bottom
R223  200  [0402]  105.22 45.72 180 bottom
R224  10.0K  [0402]  32.82 15.52 180 bottom
R225  .009  [WSL2010]  29.21 32.33 0 bottom
R226  DNI  [0402]  33.83 15.52 180 bottom
R227  10.0K  [0402]  76.05 24.88 180 bottom
R228  0  [0402]  34.72 15.52 0 bottom
R229  200k  [0402]  30.29 14.68 180 bottom
R230  0  [0402]  36.42 15.52 0 bottom
R231  332K  [0402]  29.84 15.96 270 bottom
R232  DNI  [0402]  32 15.52 0 bottom
R233  2.0K  [0402]  68.13 49.52 270 bottom
R234  560  [0402]  36.04 20.09 180 bottom
R235  4.7k  [0402]  67.23 19.01 270 top
R236  4.7k  [0402]  67.23 18.05 270 top
R237  150  [0402]  58.04 66.8 0 bottom
R238  150  [0402]  55.5 66.8 0 bottom
R239  150  [0402]  52.32 62.86 0 top
R240  1  [0402]  29.21 43.88 180 bottom
R241  DNI  [0402]  10.03 57.72 180 top
R242  DNI  [0402]  10.03 69.47 180 top
R243  10.0K  [0402]  65.28 54.86 270 bottom
R244  2.0K  [0402]  59.11 40.13 270 top
R245  20.0K  [0402]  101.66 29.2 90 bottom
R246  226K  [0402]  81.54 22.47 90 bottom
R247  22.0  [0402]  63.63 79.5 90 top
R248  22.0  [0402]  61.72 79.5 90 top
R249  DNI  [0402]  36.27 30.18 270 bottom
R250  DNI  [0402]  33.25 28.17 270 bottom
R251  DNI  [0402]  33.25 27.13 270 bottom
R252  DNI  [0402]  39.75 26.62 180 bottom
R253  DNI  [0402]  40.74 26.62 180 bottom
R254  DNI  [0402]  38.25 26.14 270 bottom
R255  DNI  [0402]  35.26 28.14 270 bottom
R256  DNI  [0402]  36.75 26.62 180 bottom
R257  DNI  [0402]  45.24 29.15 270 bottom
R258  DNI  [0402]  46.74 26.62 180 bottom
R259  DNI  [0402]  48.18 27.71 315 bottom
R260  DNI  [0402]  48.79 26.62 0 bottom
R261  DNI  [0402]  50.24 26.14 270 bottom
R262  DNI  [0402]  42.76 28.6 180 bottom
R263  DNI  [0402]  42.24 26.14 270 bottom
R264  DNI  [0402]  45.24 26.14 270 bottom
R265  DNI  [0402]  52.2 26.14 270 bottom
R266  22.0  [0402]  58.1 79.5 90 top
R267  22.0  [0402]  55.56 79.5 90 top
R268  10.0K  [0402]  12.95 57.72 0 top
R269  10.0K  [0402]  11.94 57.72 180 top
R270  4.99K  [0402]  10.92 57.72 180 top
R271  4.99K  [0402]  10.48 56.45 270 top
R272  10.0K  [0402]  12.95 69.47 0 top
R273  10.0K  [0402]  11.94 69.47 180 top
R274  4.99K  [0402]  10.48 68.2 270 top
R275  4.99K  [0402]  10.92 69.47 180 top
R276  22.0  [0402]  52.13 79.5 270 top
R277  10  [0402]  33.91 42.53 90 bottom
R278  10.0K  [0402]  24.31 67.43 0 top
R279  10.0K  [0402]  91.69 72.52 270 bottom
R280  10  [0402]  33.91 41.71 90 bottom
R281  0.1  [1210]  52.76 23.88 180 bottom
R282  200  [0402]  106.04 45.72 180 bottom
R283  200  [0402]  105.07 75.18 0 bottom
R284  200  [0402]  106.05 75.18 0 bottom
R285  200  [0402]  104.09 75.18 0 bottom
R286  200  [0402]  103.11 75.18 0 bottom
R287  200  [0402]  101.22 75.18 0 bottom
R288  200  [0402]  102.2 75.18 0 bottom
R289  200  [0402]  107.75 75.18 0 bottom
R290  200  [0402]  106.86 75.18 0 bottom
R291  20.0K  [0402]  81.54 21.53 90 bottom
R292  10.0K  [0402]  86.87 18.67 90 bottom
R293  10  [0402]  89.6 18.32 270 top
R294  150K  [0402]  86.87 19.56 90 bottom
R295  20.0K  [0402]  86.87 20.45 270 bottom
R296  20.0K  [0402]  86.87 21.34 270 bottom
R297  1K  [0402]  89.6 19.28 270 top
R298  0.003  [WSL2010_001]  96.97 22.69 90 top
R299  1K  [0805]  76.1 19.65 90 bottom
R300  1K  [0805]  75.44 33.53 0 top
R301  DNI  [0402]  11.94 23.62 180 bottom
R302  DNI  [0402]  15.54 23.62 180 bottom
R303  2.0K  [0402]  42.55 58.41 0 bottom
R304  2.0K  [0402]  43.41 58.41 180 bottom
R305  2.0K  [0402]  42.55 55.21 180 bottom
R306  2.0K  [0402]  43.41 55.21 0 bottom
R307  2.0K  [0402]  68.13 48.64 270 bottom
R319  DNI  [0402]  40.83 54.17 180 top
RJ1  7499151120  [RJ45_2X1]  7.26 15.77 270 top
S1  PB Switch  [PUSHBUTTON_SMT]  89.93 48.35 180 top
S2  PB Switch  [PUSHBUTTON_SMT]  89.93 53.97 0 top
S3  PB Switch  [PUSHBUTTON_SMT]  89.93 59.55 0 top
S4  PB Switch  [PUSHBUTTON_SMT]  89.93 65.12 0 top
S5  PB Switch  [PUSHBUTTON_SMT]  89.93 42.71 180 top
S6  PB Switch  [PUSHBUTTON_SMT]  89.93 70.74 0 top
SW1  DIPSWITCH4  [DIPSWITCH_SMT_QUAD]  91.44 43.18 180 bottom
SW2  DIPSWITCH4  [DIPSWITCH_SMT_QUAD]  91.44 59.31 0 bottom
SW3  POWER SW  [SW-PUSH-8X8]  107.31 31.11 90 top
TP1  T POINT R  [TEST_PAD_SMT]  14.73 59.44 180 top
TP2  T POINT R  [TEST_PAD_SMT]  42.24 55.37 270 top
TP5  T POINT R  [TEST_PAD_SMT]  72.04 24.53 0 top
TP7  T POINT R  [TEST_PAD_SMT]  14.86 70.81 180 top
TP8  T POINT R  [TEST_PAD_SMT]  33.53 70.48 270 top
TP9  T POINT R  [TEST_PAD_SMT]  83.31 62.48 270 top
U1  10M50DAF484  [F484]  43.75 37.15 0 top
U2  Si5338A-CUSTOM  [QFN24]  48.1 56.68 270 top
U3  LTC4218CGN  [16-LEAD_PLASTIC_SSOP]  84.33 20.83 270 top
U4  REF3125  [SOT23-3]  11.49 50.16 0 bottom
U5  IS43TR16640A -125JBLI  [ISSI_DDR3_96_9X13]  66.29 39.95 180 top
U6  IS43TR81280A -125JBLI  [ISSI_DDR3_78_8X10P5]  66.29 41.15 0 bottom
U7  N25Q512A83GSF40F  [SO16_WIDE]  35.43 60.07 90 bottom
U8  ADV7513BSWZ  [LQFP-64]  76.71 55.12 180 top
U9  Ethernet PHY, 88E1111  [BCC96]  7.72 34.54 0 top
U10  Ethernet PHY, 88E1111  [BCC96]  20.32 34.54 0 top
U11  FT232R  [QFN32]  46.74 67.94 180 top
U12  TPD2EUSB30  [DRT]  42.67 71.63 0 bottom
U13  EPM1270_M256FBGA  [M256]  61.21 57.53 270 top
U14  MAX811  [SOT-143]  56.38 58.56 90 bottom
U15  TPD2EUSB30  [DRT]  32 71.63 0 bottom
U16  CY7C68013A_QFN  [QFN56]  34.92 62.53 270 top
U17  EN2342  [QFN68-ENPIRON]  88.62 33.43 270 top
U18  FDMC8878  [FDMC8878_VER2]  92.84 19.3 0 top
U22  EN6337  [QFN38-ENPIRON]  103.12 60.45 270 bottom
U23  EN6337  [QFN38-ENPIRON]  62.1 26.16 0 top
U24  EP5358HUI  [UQFN16]  27.3 69.47 180 top
U25  EP5358HUI  [UQFN16]  91.06 69.47 90 bottom
U26  EP5358LUI  [UQFN16]  73 25.53 0 bottom
U27  EN6337  [QFN38-ENPIRON]  30.96 19.71 0 bottom
U29  LTC2990  [MSOP10]  62.87 19.68 0 top
U30  LTC2990  [MSOP10]  62.87 19.68 180 bottom
U33  DAC8551  [MSOP8]  11.64 49.15 270 top
U34  DNI  [TSOC-6]  36.83 53.72 90 top
U35  AD8515  [SOT-23]  11.43 56.83 0 bottom
U36  AD8515  [SOT-23]  11.43 68.58 0 bottom
U37  824013  [SOT23-6L]  104.65 42.29 270 bottom
U38  824013  [SOT23-6L]  104.65 48.89 270 bottom
U39  824013  [SOT23-6L]  104.65 78.49 270 bottom
U40  824013  [SOT23-6L]  104.65 71.63 90 bottom
V1  VIA_1  [STAR_VIA]  57.96 38.06 0 top
V2  VIA_1  [STAR_VIA]  57.96 39.08 0 top
V27  VIA_1  [STAR_VIA]  8.23 26.72 90 bottom
V28  VIA_1  [STAR_VIA]  8.23 27.81 90 bottom
V29  VIA_1  [STAR_VIA]  21.31 26.47 90 bottom
V30  VIA_1  [STAR_VIA]  21.34 27.81 90 bottom
V34  VIA_1  [TP_020RD_SMT]  95.61 32.41 180 top
V35  SENSE_PAD  [SENSE]  52.37 21.84 0 bottom
V36  SENSE_PAD  [SENSE]  53.14 21.84 0 bottom
V37  SENSE_PAD  [SENSE]  27.18 59.71 90 bottom
V38  SENSE_PAD  [SENSE]  27.18 60.39 90 bottom
V39  SENSE_PAD  [SENSE]  94.67 23.06 90 top
V40  SENSE_PAD  [SENSE]  94.67 22.42 90 top
V43  SENSE_PAD  [SENSE]  57.91 31.7 0 bottom
V44  SENSE_PAD  [SENSE]  58.67 31.7 0 bottom
V49  SENSE_PAD  [SENSE]  29.27 30.09 0 bottom
V50  SENSE_PAD  [SENSE]  28.5 30.09 0 bottom
X1  Si570  [XTAL_SI570]  41.15 20.07 90 bottom
Y1  25.00MHz  [XTAL_FA-128]  49.24 62.52 0 top
Y2  24.00MHz  [XTAL_FA-128]  36.32 69.52 0 top

## Library data of the parts
C1 C32 C68 C71 C76 C79 C83 C150 C178 C180 C196 C198 C201 C202 C211 C214 C215 C217 C218 C255 C256 C315 C334 C335 C341 = CAP: Tolerance: *; User Part Number: *
C2 C4-C9 C11-C14 C31 C34 C49 C64 C66 C72-C75 C77 C78 C80-C82 C84 C89-C101 C106-C119 C121 C123 C126 C130-C138 C140-C149 C179 C181 C183 C184 C197 C209 C210 C212 C236-C241 C324-C327 C329 C330 C355 = Cap 0.1UF +/-10% 10V 0402: User Part Number: PART#; Tolerance: TOL
C3 C10 = Cap 18PF 5% 50V 0402: User Part Number: PART#; Tolerance: TOL
C15-C30 C125 C127-C129 C139 C151 C152 C154 C159 C160 C162-C164 C174-C177 C205-C208 C213 C231 C242 = CAP: User Part Number: PART#; Tolerance: TOL
C33 = Cap 0.47UF -20%+80% 10V 0402: User Part Number: PART#; Tolerance: TOL
C65 C69 C70 C120 C122 C124 C166 = Cap 4.7uF 10% 6.3V X5R 0402: User Part Number: PART#; Tolerance: TOL
C67 C153 C155-C157 C161 C168 C170 C200 = CAP: User Part Number: *; Tolerance: *
C85-C88 C102-C104 = CAP 0.01UF 16V X7R 0402: User Part Number: PART#; Tolerance: TOL
C105 = CAP 0.01UF 16V X7R 0402: User Part Number: PART#; Tolerance: TOL; signal model: CAP_0.01UF_16V_X7R_0402_0402_0._0.01uF
C158 = PCAP: User Part Number: PART#; Tolerance: TOL
C165 = CAP_NP: User Part Number: PART#; Tolerance: TOL
C169 C171-C173 C203 C204 = CAP 47UF +/-20% 6.3V 1206: Tolerance: TOL; User Part Number: PART#
C182 C199 C226-C229 C232-C235 C246-C251 C309 C310 C313 C316 C328 C331 C340 C342 = Cap 0.1UF +/-10% 10V 0402
C216 = Cap 4.7uF 10% 6.3V X5R 0402
C219-C225 C230 C308 C311 C312 C343-C350 = CAP 1.0UF 10% 10V 0402
C314 C318 C319 = CAP
C351-C354 = CAP 1.0UF 10% 10V 0402: User Part Number: PART#; Tolerance: TOL
D1 = LED: Tolerance: *; User Part Number: *
D2 D13-D23 = LED_WURTH: Tolerance: *; User Part Number: *
D41 D42 = 82401646
J1 J18 J19 = CONN, SMA: Tolerance: XXX; User Part Number: XXX
J2 = CONN, HSMC_Male: Tolerance: *; User Part Number: *
J4 J5 = 2x6 PMOD
J7 = CON2: User Part Number: *
J8 = HDMI 19-Pin Receptacle: Tolerance: XXX; User Part Number: XXX
J11 J12 = USB MINI-B
J13 J14 = 2x5: User Part Number: *; Tolerance: *
J15 = Jack-DC
J20 = 2x10 Header
L1 L10 L12 = IND Ferrite 0402 300mA/220: User Part Number: PART#; Tolerance: TOL
L2-L5 = IND 10uH 245mA 0.82ohm 0806 SMD
L6-L9 L11 = INDUCTOR: Tolerance: TOL; User Part Number: PART#
LED1 = RGB_LED_HSMF_C118
POT1 = POT500
Q1-Q3 = PWRMOSFET_EN_GSD
R1 R2 R45 R49 R63-R70 R84-R89 R141 R144 R149 R151 R153 R206-R209 R301 R302 = RES 49.9 OHM 1% 1/16W 0402: User Part Number: PART#; Tolerance: TOL
R6 R8 R44 R111 R142 R143 R145-R148 R150 R152 R154 R156-R158 R160 R162 = RES 10K OHM 5% 1/16W 0402 SMD: User Part Number: PART#; Tolerance: TOL
R7 R10 R31 R59-R62 R72 R82 R83 R93 R105 R235 R236 = RES 4.7k OHM 5% 1/16W 0402: User Part Number: PART#; Tolerance: TOL
R15-R30 R241 R242 R277 R280 R293 = RES 10 OHM 1.0% 1/16W 0402: User Part Number: PART#; Tolerance: TOL
R33 R52 R94 R95 = RES 100 OHM 1.0% 1/16W 0402: User Part Number: PART#; Tolerance: TOL
R34-R40 R42 R48 R56 R73-R81 R96 R97 R101-R103 R107 R108 R112-R115 R118-R140 R155 R159 R163-R167 R169-R172 R174 R176-R179 R181 R184-R187 R189-R191 R194-R201 R204 R205 R210 R213-R215 R221 R222 R224 R226-R228 R230 R232 R234 R243 R245-R269 R272 R273 R276 R278 R279 R291 R292 R294-R296 = RESISTOR: User Part Number: PART#; Tolerance: TOL
R41 = RES 100 OHM 1.0% 1/16W 0402: User Part Number: PART#; Tolerance: TOL; signal model: RESISTOR_0402_100_100
R43 R46 R47 R53-R55 R57 R58 R98 R99 R116 R117 R233 R303-R307 = RES 2.0K OHM 1/16W 1% 0402 SMD: User Part Number: PART#; Tolerance: TOL
R51 R100 R104 R106 R109 R110 R161 R237-R239 R297 = R: User Part Number: PART#; Tolerance: TOL
R71 R92 R270 R271 R274 R275 = RES 4.99K OHM 1.0% 1/16W 0402: User Part Number: PART#; Tolerance: TOL
R90 R91 = RES 49.9 OHM 1% 1/16W 0402: User Part Number: PART#; Tolerance: TOL; signal model: RES_49.9_OHM_1%_1/16W_0402_0402_49.9
R168 R192 R193 R229 R240 = RES: User Part Number: PART#; Tolerance: TOL
R188 R212 R281 = RESISTOR: Tolerance: tol*
R211 R216-R220 R223 R282-R290 = RESISTOR: User Part Number: PART#; Tolerance: TOL; signal model: RESISTOR_0402_200_200
R225 R298 = RESISTOR
R231 = RES 332K OHM 1% 1/10W 0402 SMD: User Part Number: PART#; Tolerance: TOL
R244 = RES 2.0K OHM 1/16W 1% 0402 SMD: User Part Number: PART#; Tolerance: TOL; signal model: RES_2.0K_OHM_1/16W_1%_0402_SMD__2.0K
R299 R300 = RESISTOR: Tolerance: TOL; User Part Number: PART#
R319 = RESISTOR_0402: User Part Number: PART#; Tolerance: TOL
RJ1 = CONN, RJ45, 7499151120
S1-S6 = TS-A02SA-2-S100
SW1 SW2 = SPST4
SW3 = SW-PUSH_3
TP1 TP2 TP5 TP7-TP9 = T POINT R
U1 = 10M50DAF484_v2.0.5
U2 = Clock Gen, Si5338A_CUSTOM, A5SK: User Part Number: *
U3 = LTC4218CGN
U4 = REF3125
U5 = IS43TR16640A -125JBLI
U6 = IS43TR81280A -125JBLI
U7 = N25Q00AA13GSF40F_1
U8 = ADV7513BSWZ
U9 U10 = Ethernet PHY, 88E1111: User Part Number: *; Tolerance: *
U11 = FT232R
U12 U15 = TPD2EUSB30
U13 = EPM1270M256_2: Tolerance: *; User Part Number: *
U14 = MAX811: User Part Number: PART#; Tolerance: TOL
U16 = CY7C68013A_56QFN: User Part Number: *
U17 = EN2360: User Part Number: *
U18 = FDMC8878_VER2: User Part Number: *
U22 U23 U27 = EN6337: User Part Number: *
U24 U25 = EP5358HUI
U26 = EP5358LUI
U29 U30 = LTC2990
U33 = DAC8551: User Part Number: *
U34 = DS28E02
U35 U36 = AD8515
U37-U40 = 824013
V1 V2 V27-V30 = TP_18_8_mil, PTH
V34 = VIA_1: User Part Number: *; Tolerance: *
V35-V40 V43 V44 V49 V50 = SENSE_PAD: User Part Number: *
X1 = XO, I2C Programmable 2.5V Si570: User Part Number: *
Y1 = XTAL 25MHz 30PPM 18pF mini: User Part Number: *
Y2 = CRYSTAL_SM_13: User Part Number: *

## Footprints (pads in the part's own frame, mm; a bottom-side part is the same pattern mirrored in y, then rotated)
16-LEAD_PLASTIC_SSOP
  oval 0.356x2.032 smd: 1(-2.223,-2.6) 2(-1.587,-2.6) 3(-0.953,-2.6) 4(-0.318,-2.6) 5(0.318,-2.6) 6(0.953,-2.6) 7(1.587,-2.6) 8(2.223,-2.6) 9(2.223,2.6) 10(1.587,2.6) 11(0.953,2.6) 12(0.318,2.6) 13(-0.318,2.6) 14(-0.953,2.6) 15(-1.587,2.6) 16(-2.223,2.6)
0402
  rect 0.508x0.508 smd: 1(0,0.445) 2(0,-0.445)
0603
  rect 1.016x1.016 smd: 1(-0.762,0) 2(0.762,0)
0805
  rect 1.6x1.321 smd: 1(0,0.95) 2(0,-0.95)
0806
  rect 1.27x1.524 smd: 1(0,1.016) 2(0,-1.016)
1206
  rect 1.27x1.778 smd: 1(-1.524,0) 2(1.524,0)
1210
  rect 1.6x2.7 smd: 1(-1.4,0) 2(1.4,0)
7343P
  rect 2.489x2.591 smd: 1(-3.302,0) 2(3.302,0)
BCC96
  rect 0.406x0.305 smd: 1(-4.1,3.6) 2(-3.5,3.3) 3(-4.1,3) 4(-3.5,2.7) 5(-4.1,2.4) 6(-3.5,2.1) 7(-4.1,1.8) 8(-3.5,1.5) 9(-4.1,1.2) 10(-3.5,0.9) 11(-4.1,0.6) 12(-3.5,0.3) 13(-4.1,0) 14(-3.5,-0.3) 15(-4.1,-0.6) 16(-3.5,-0.9) 17(-4.1,-1.2) 18(-3.5,-1.5) 19(-4.1,-1.8) 20(-3.5,-2.1) 21(-4.1,-2.4) 22(-3.5,-2.7) 23(-4.1,-3) 24(-4.1,-3.6) 50(4.1,-3.6) 51(4.1,-3) 52(3.5,-2.7) 53(4.1,-2.4) 54(3.5,-2.1) 55(4.1,-1.8) 56(3.5,-1.5) 57(4.1,-1.2) 58(3.5,-0.9) 59(4.1,-0.6) 60(3.5,-0.3) 61(4.1,0) 62(3.5,0.3) 63(4.1,0.6) 64(3.5,0.9) 65(4.1,1.2) 66(3.5,1.5) 67(4.1,1.8) 68(3.5,2.1) 69(4.1,2.4) 70(3.5,2.7) 71(4.1,3) 72(3.5,3.3) 73(4.1,3.6)
  rect 0.305x0.406 smd: 25(-3.6,-4.1) 26(-3.3,-3.5) 27(-3,-4.1) 28(-2.7,-3.5) 29(-2.4,-4.1) 30(-2.1,-3.5) 31(-1.8,-4.1) 32(-1.5,-3.5) 33(-1.2,-4.1) 34(-0.9,-3.5) 35(-0.6,-4.1) 36(-0.3,-3.5) 37(0,-4.1) 38(0.3,-3.5) 39(0.6,-4.1) 40(0.9,-3.5) 41(1.2,-4.1) 42(1.5,-3.5) 43(1.8,-4.1) 44(2.1,-3.5) 45(2.4,-4.1) 46(2.7,-3.5) 47(3,-4.1) 48(3.3,-3.5) 49(3.6,-4.1) 74(3.6,4.1) 75(3,4.1) 76(2.7,3.5) 77(2.4,4.1) 78(2.1,3.5) 79(1.8,4.1) 80(1.5,3.5) 81(1.2,4.1) 82(0.9,3.5) 83(0.6,4.1) 84(0.3,3.5) 85(0,4.1) 86(-0.3,3.5) 87(-0.6,4.1) 88(-0.9,3.5) 89(-1.2,4.1) 90(-1.5,3.5) 91(-1.8,4.1) 92(-2.1,3.5) 93(-2.4,4.1) 94(-2.7,3.5) 95(-3,4.1) 96(-3.6,4.1)
  rect 4.801x5.004 smd: 97(0,0)
BLUE_LED_0603
  rect 1.092x0.991 smd: 1(-0.851,0) 2(0.851,0)
C0402-BGA
  rrect 0.635x0.635 smd: 1(-0.5,0) 2(0.5,0)
C0402_BGA
  rrect 0.635x0.635 smd: 1(-0.5,0) 2(0.5,0)
DIPSWITCH_SMT_QUAD
  rect 0.762x1.27 smd: 1(-1.905,-3.81) 2(-0.635,-3.81) 3(0.635,-3.81) 4(1.905,-3.81) 5(1.905,3.81) 6(0.635,3.81) 7(-0.635,3.81) 8(-1.905,3.81)
DRT
  rect 0.203x0.305 smd: 1(-0.35,-0.475) 2(0.35,-0.475) 3(0,0.475)
F484
  round 0.48 smd: A1(-10.5,10.5) A2(-9.5,10.5) A3(-8.5,10.5) A4(-7.5,10.5) A5(-6.5,10.5) A6(-5.5,10.5) A7(-4.5,10.5) A8(-3.5,10.5) A9(-2.5,10.5) A10(-1.5,10.5) A11(-0.5,10.5) A12(0.5,10.5) A13(1.5,10.5) A14(2.5,10.5) A15(3.5,10.5) A16(4.5,10.5) A17(5.5,10.5) A18(6.5,10.5) A19(7.5,10.5) A20(8.5,10.5) A21(9.5,10.5) A22(10.5,10.5) AA1(-10.5,-9.5) AA2(-9.5,-9.5) AA3(-8.5,-9.5) AA4(-7.5,-9.5) AA5(-6.5,-9.5) AA6(-5.5,-9.5) AA7(-4.5,-9.5) AA8(-3.5,-9.5) AA9(-2.5,-9.5) AA10(-1.5,-9.5) AA11(-0.5,-9.5) AA12(0.5,-9.5) AA13(1.5,-9.5) AA14(2.5,-9.5) AA15(3.5,-9.5) AA16(4.5,-9.5) AA17(5.5,-9.5) AA18(6.5,-9.5) AA19(7.5,-9.5) AA20(8.5,-9.5) AA21(9.5,-9.5) AA22(10.5,-9.5) AB1(-10.5,-10.5) AB2(-9.5,-10.5) AB3(-8.5,-10.5) AB4(-7.5,-10.5) AB5(-6.5,-10.5) AB6(-5.5,-10.5) AB7(-4.5,-10.5) AB8(-3.5,-10.5) AB9(-2.5,-10.5) AB10(-1.5,-10.5) AB11(-0.5,-10.5) AB12(0.5,-10.5) AB13(1.5,-10.5) AB14(2.5,-10.5) AB15(3.5,-10.5) AB16(4.5,-10.5) AB17(5.5,-10.5) AB18(6.5,-10.5) AB19(7.5,-10.5) AB20(8.5,-10.5) AB21(9.5,-10.5) AB22(10.5,-10.5) B1(-10.5,9.5) B2(-9.5,9.5) B3(-8.5,9.5) B4(-7.5,9.5) B5(-6.5,9.5) B6(-5.5,9.5) B7(-4.5,9.5) B8(-3.5,9.5) B9(-2.5,9.5) B10(-1.5,9.5) B11(-0.5,9.5) B12(0.5,9.5) B13(1.5,9.5) B14(2.5,9.5) B15(3.5,9.5) B16(4.5,9.5) B17(5.5,9.5) B18(6.5,9.5) B19(7.5,9.5) B20(8.5,9.5) B21(9.5,9.5) B22(10.5,9.5) C1(-10.5,8.5) C2(-9.5,8.5) C3(-8.5,8.5) C4(-7.5,8.5) C5(-6.5,8.5) C6(-5.5,8.5) C7(-4.5,8.5) C8(-3.5,8.5) C9(-2.5,8.5) C10(-1.5,8.5) C11(-0.5,8.5) C12(0.5,8.5) C13(1.5,8.5) C14(2.5,8.5) C15(3.5,8.5) C16(4.5,8.5) C17(5.5,8.5) C18(6.5,8.5) C19(7.5,8.5) C20(8.5,8.5) C21(9.5,8.5) C22(10.5,8.5) D1(-10.5,7.5) D2(-9.5,7.5) D3(-8.5,7.5) D4(-7.5,7.5) D5(-6.5,7.5) D6(-5.5,7.5) D7(-4.5,7.5) D8(-3.5,7.5) D9(-2.5,7.5) D10(-1.5,7.5) D11(-0.5,7.5) D12(0.5,7.5) D13(1.5,7.5) D14(2.5,7.5) D15(3.5,7.5) D16(4.5,7.5) D17(5.5,7.5) D18(6.5,7.5) D19(7.5,7.5) D20(8.5,7.5) D21(9.5,7.5) D22(10.5,7.5) E1(-10.5,6.5) E2(-9.5,6.5) E3(-8.5,6.5) E4(-7.5,6.5) E5(-6.5,6.5) E6(-5.5,6.5) E7(-4.5,6.5) E8(-3.5,6.5) E9(-2.5,6.5) E10(-1.5,6.5) E11(-0.5,6.5) E12(0.5,6.5) E13(1.5,6.5) E14(2.5,6.5) E15(3.5,6.5) E16(4.5,6.5) E17(5.5,6.5) E18(6.5,6.5) E19(7.5,6.5) E20(8.5,6.5) E21(9.5,6.5) E22(10.5,6.5) F1(-10.5,5.5) F2(-9.5,5.5) F3(-8.5,5.5) F4(-7.5,5.5) F5(-6.5,5.5) F6(-5.5,5.5) F7(-4.5,5.5) F8(-3.5,5.5) F9(-2.5,5.5) F10(-1.5,5.5) F11(-0.5,5.5) F12(0.5,5.5) F13(1.5,5.5) F14(2.5,5.5) F15(3.5,5.5) F16(4.5,5.5) F17(5.5,5.5) F18(6.5,5.5) F19(7.5,5.5) F20(8.5,5.5) F21(9.5,5.5) F22(10.5,5.5) G1(-10.5,4.5) G2(-9.5,4.5) G3(-8.5,4.5) G4(-7.5,4.5) G5(-6.5,4.5) G6(-5.5,4.5) G7(-4.5,4.5) G8(-3.5,4.5) G9(-2.5,4.5) G10(-1.5,4.5) G11(-0.5,4.5) G12(0.5,4.5) G13(1.5,4.5) G14(2.5,4.5) G15(3.5,4.5) G16(4.5,4.5) G17(5.5,4.5) G18(6.5,4.5) G19(7.5,4.5) G20(8.5,4.5) G21(9.5,4.5) G22(10.5,4.5) H1(-10.5,3.5) H2(-9.5,3.5) H3(-8.5,3.5) H4(-7.5,3.5) H5(-6.5,3.5) H6(-5.5,3.5) H7(-4.5,3.5) H8(-3.5,3.5) H9(-2.5,3.5) H10(-1.5,3.5) H11(-0.5,3.5) H12(0.5,3.5) H13(1.5,3.5) H14(2.5,3.5) H15(3.5,3.5) H16(4.5,3.5) H17(5.5,3.5) H18(6.5,3.5) H19(7.5,3.5) H20(8.5,3.5) H21(9.5,3.5) H22(10.5,3.5) J1(-10.5,2.5) J2(-9.5,2.5) J3(-8.5,2.5) J4(-7.5,2.5) J5(-6.5,2.5) J6(-5.5,2.5) J7(-4.5,2.5) J8(-3.5,2.5) J9(-2.5,2.5) J10(-1.5,2.5) J11(-0.5,2.5) J12(0.5,2.5) J13(1.5,2.5) J14(2.5,2.5) J15(3.5,2.5) J16(4.5,2.5) J17(5.5,2.5) J18(6.5,2.5) J19(7.5,2.5) J20(8.5,2.5) J21(9.5,2.5) J22(10.5,2.5) K1(-10.5,1.5) K2(-9.5,1.5) K3(-8.5,1.5) K4(-7.5,1.5) K5(-6.5,1.5) K6(-5.5,1.5) K7(-4.5,1.5) K8(-3.5,1.5) K9(-2.5,1.5) K10(-1.5,1.5) K11(-0.5,1.5) K12(0.5,1.5) K13(1.5,1.5) K14(2.5,1.5) K15(3.5,1.5) K16(4.5,1.5) K17(5.5,1.5) K18(6.5,1.5) K19(7.5,1.5) K20(8.5,1.5) K21(9.5,1.5) K22(10.5,1.5) L1(-10.5,0.5) L2(-9.5,0.5) L3(-8.5,0.5) L4(-7.5,0.5) L5(-6.5,0.5) L6(-5.5,0.5) L7(-4.5,0.5) L8(-3.5,0.5) L9(-2.5,0.5) L10(-1.5,0.5) L11(-0.5,0.5) L12(0.5,0.5) L13(1.5,0.5) L14(2.5,0.5) L15(3.5,0.5) L16(4.5,0.5) L17(5.5,0.5) L18(6.5,0.5) L19(7.5,0.5) L20(8.5,0.5) L21(9.5,0.5) L22(10.5,0.5) M1(-10.5,-0.5) M2(-9.5,-0.5) M3(-8.5,-0.5) M4(-7.5,-0.5) M5(-6.5,-0.5) M6(-5.5,-0.5) M7(-4.5,-0.5) M8(-3.5,-0.5) M9(-2.5,-0.5) M10(-1.5,-0.5) M11(-0.5,-0.5) M12(0.5,-0.5) M13(1.5,-0.5) M14(2.5,-0.5) M15(3.5,-0.5) M16(4.5,-0.5) M17(5.5,-0.5) M18(6.5,-0.5) M19(7.5,-0.5) M20(8.5,-0.5) M21(9.5,-0.5) M22(10.5,-0.5) N1(-10.5,-1.5) N2(-9.5,-1.5) N3(-8.5,-1.5) N4(-7.5,-1.5) N5(-6.5,-1.5) N6(-5.5,-1.5) N7(-4.5,-1.5) N8(-3.5,-1.5) N9(-2.5,-1.5) N10(-1.5,-1.5) N11(-0.5,-1.5) N12(0.5,-1.5) N13(1.5,-1.5) N14(2.5,-1.5) N15(3.5,-1.5) N16(4.5,-1.5) N17(5.5,-1.5) N18(6.5,-1.5) N19(7.5,-1.5) N20(8.5,-1.5) N21(9.5,-1.5) N22(10.5,-1.5) P1(-10.5,-2.5) P2(-9.5,-2.5) P3(-8.5,-2.5) P4(-7.5,-2.5) P5(-6.5,-2.5) P6(-5.5,-2.5) P7(-4.5,-2.5) P8(-3.5,-2.5) P9(-2.5,-2.5) P10(-1.5,-2.5) P11(-0.5,-2.5) P12(0.5,-2.5) P13(1.5,-2.5) P14(2.5,-2.5) P15(3.5,-2.5) P16(4.5,-2.5) P17(5.5,-2.5) P18(6.5,-2.5) P19(7.5,-2.5) P20(8.5,-2.5) P21(9.5,-2.5) P22(10.5,-2.5) R1(-10.5,-3.5) R2(-9.5,-3.5) R3(-8.5,-3.5) R4(-7.5,-3.5) R5(-6.5,-3.5) R6(-5.5,-3.5) R7(-4.5,-3.5) R8(-3.5,-3.5) R9(-2.5,-3.5) R10(-1.5,-3.5) R11(-0.5,-3.5) R12(0.5,-3.5) R13(1.5,-3.5) R14(2.5,-3.5) R15(3.5,-3.5) R16(4.5,-3.5) R17(5.5,-3.5) R18(6.5,-3.5) R19(7.5,-3.5) R20(8.5,-3.5) R21(9.5,-3.5) R22(10.5,-3.5) T1(-10.5,-4.5) T2(-9.5,-4.5) T3(-8.5,-4.5) T4(-7.5,-4.5) T5(-6.5,-4.5) T6(-5.5,-4.5) T7(-4.5,-4.5) T8(-3.5,-4.5) T9(-2.5,-4.5) T10(-1.5,-4.5) T11(-0.5,-4.5) T12(0.5,-4.5) T13(1.5,-4.5) T14(2.5,-4.5) T15(3.5,-4.5) T16(4.5,-4.5) T17(5.5,-4.5) T18(6.5,-4.5) T19(7.5,-4.5) T20(8.5,-4.5) T21(9.5,-4.5) T22(10.5,-4.5) U1(-10.5,-5.5) U2(-9.5,-5.5) U3(-8.5,-5.5) U4(-7.5,-5.5) U5(-6.5,-5.5) U6(-5.5,-5.5) U7(-4.5,-5.5) U8(-3.5,-5.5) U9(-2.5,-5.5) U10(-1.5,-5.5) U11(-0.5,-5.5) U12(0.5,-5.5) U13(1.5,-5.5) U14(2.5,-5.5) U15(3.5,-5.5) U16(4.5,-5.5) U17(5.5,-5.5) U18(6.5,-5.5) U19(7.5,-5.5) U20(8.5,-5.5) U21(9.5,-5.5) U22(10.5,-5.5) V1(-10.5,-6.5) V2(-9.5,-6.5) V3(-8.5,-6.5) V4(-7.5,-6.5) V5(-6.5,-6.5) V6(-5.5,-6.5) V7(-4.5,-6.5) V8(-3.5,-6.5) V9(-2.5,-6.5) V10(-1.5,-6.5) V11(-0.5,-6.5) V12(0.5,-6.5) V13(1.5,-6.5) V14(2.5,-6.5) V15(3.5,-6.5) V16(4.5,-6.5) V17(5.5,-6.5) V18(6.5,-6.5) V19(7.5,-6.5) V20(8.5,-6.5) V21(9.5,-6.5) V22(10.5,-6.5) W1(-10.5,-7.5) W2(-9.5,-7.5) W3(-8.5,-7.5) W4(-7.5,-7.5) W5(-6.5,-7.5) W6(-5.5,-7.5) W7(-4.5,-7.5) W8(-3.5,-7.5) W9(-2.5,-7.5) W10(-1.5,-7.5) W11(-0.5,-7.5) W12(0.5,-7.5) W13(1.5,-7.5) W14(2.5,-7.5) W15(3.5,-7.5) W16(4.5,-7.5) W17(5.5,-7.5) W18(6.5,-7.5) W19(7.5,-7.5) W20(8.5,-7.5) W21(9.5,-7.5) W22(10.5,-7.5) Y1(-10.5,-8.5) Y2(-9.5,-8.5) Y3(-8.5,-8.5) Y4(-7.5,-8.5) Y5(-6.5,-8.5) Y6(-5.5,-8.5) Y7(-4.5,-8.5) Y8(-3.5,-8.5) Y9(-2.5,-8.5) Y10(-1.5,-8.5) Y11(-0.5,-8.5) Y12(0.5,-8.5) Y13(1.5,-8.5) Y14(2.5,-8.5) Y15(3.5,-8.5) Y16(4.5,-8.5) Y17(5.5,-8.5) Y18(6.5,-8.5) Y19(7.5,-8.5) Y20(8.5,-8.5) Y21(9.5,-8.5) Y22(10.5,-8.5)
FDMC8878_VER2
  rect 0.432x0.889 smd: 1(-0.975,-1.425) 2(-0.325,-1.425) 3(0.325,-1.425) 4(0.975,-1.425)
  custom 2.382x2.17 smd: 5(0,0.785)
HDMI-19PIN
  rect 2.337x0.279 smd: 1(0,-4.5) 2(0,-4) 3(0,-3.5) 4(0,-3) 5(0,-2.5) 6(0,-2) 7(0,-1.5) 8(0,-1) 9(0,-0.5) 10(0,0) 11(0,0.5) 12(0,1) 13(0,1.5) 14(0,2) 15(0,2.5) 16(0,3) 17(0,3.5) 18(0,4) 19(0,4.5)
  oval 2.743x1.524 hole 2.108x0.889: G1(-6.595,-7.25) G3(-6.595,7.25)
  oval 3.302x1.524 hole 2.692x0.889: G2(-0.625,-7.25) G4(-0.625,7.25)
HDR2X1_100MIL
  rect 1.524x1.524 hole 1.016: 1(0,0)
  round 1.524 hole 1.016: 2(2.54,0)
HDR2X5_100MIL_SMT
  rect 3.175x1.27 smd: 1(-2.731,7.62) 2(2.731,7.62) 3(-2.731,5.08) 4(2.731,5.08) 5(-2.731,2.54) 6(2.731,2.54) 7(-2.731,0) 8(2.731,0) 9(-2.731,-2.54) 10(2.731,-2.54)
HDR2X6_100MIL
  rect 1.524x1.524 hole 1.016: 1(0,0)
  round 1.524 hole 1.016: 2(0,-2.54) 3(0,-5.08) 4(0,-7.62) 5(0,-10.16) 6(0,-12.7) 7(2.54,0) 8(2.54,-2.54) 9(2.54,-5.08) 10(2.54,-7.62) 11(2.54,-10.16) 12(2.54,-12.7)
HDR2X10_100MIL
  rect 1.5x1.5 hole 1: 1(0,0)
  round 1.5 hole 1: 2(0,-2.54) 3(2.54,0) 4(2.54,-2.54) 5(5.08,0) 6(5.08,-2.54) 7(7.62,0) 8(7.62,-2.54) 9(10.16,0) 10(10.16,-2.54) 11(12.7,0) 12(12.7,-2.54) 13(15.24,0) 14(15.24,-2.54) 15(17.78,0) 16(17.78,-2.54) 17(20.32,0) 18(20.32,-2.54) 19(22.86,0) 20(22.86,-2.54)
HSMF-C118
  rect 1.499x0.991 smd: 1(1.75,-0.7) 2(1.75,0.7) 3(-1.75,0.7) 4(-1.75,-0.7)
ISSI_DDR3_78_8X10P5
  round 0.4 smd: A1(-3.2,4.8) A2(-2.4,4.8) A3(-1.6,4.8) A7(1.6,4.8) A8(2.4,4.8) A9(3.2,4.8) B1(-3.2,4) B2(-2.4,4) B3(-1.6,4) B7(1.6,4) B8(2.4,4) B9(3.2,4) C1(-3.2,3.2) C2(-2.4,3.2) C3(-1.6,3.2) C7(1.6,3.2) C8(2.4,3.2) C9(3.2,3.2) D1(-3.2,2.4) D2(-2.4,2.4) D3(-1.6,2.4) D7(1.6,2.4) D8(2.4,2.4) D9(3.2,2.4) E1(-3.2,1.6) E2(-2.4,1.6) E3(-1.6,1.6) E7(1.6,1.6) E8(2.4,1.6) E9(3.2,1.6) F1(-3.2,0.8) F2(-2.4,0.8) F3(-1.6,0.8) F7(1.6,0.8) F8(2.4,0.8) F9(3.2,0.8) G1(-3.2,0) G2(-2.4,0) G3(-1.6,0) G7(1.6,0) G8(2.4,0) G9(3.2,0) H1(-3.2,-0.8) H2(-2.4,-0.8) H3(-1.6,-0.8) H7(1.6,-0.8) H8(2.4,-0.8) H9(3.2,-0.8) J1(-3.2,-1.6) J2(-2.4,-1.6) J3(-1.6,-1.6) J7(1.6,-1.6) J8(2.4,-1.6) J9(3.2,-1.6) K1(-3.2,-2.4) K2(-2.4,-2.4) K3(-1.6,-2.4) K7(1.6,-2.4) K8(2.4,-2.4) K9(3.2,-2.4) L1(-3.2,-3.2) L2(-2.4,-3.2) L3(-1.6,-3.2) L7(1.6,-3.2) L8(2.4,-3.2) L9(3.2,-3.2) M1(-3.2,-4) M2(-2.4,-4) M3(-1.6,-4) M7(1.6,-4) M8(2.4,-4) M9(3.2,-4) N1(-3.2,-4.8) N2(-2.4,-4.8) N3(-1.6,-4.8) N7(1.6,-4.8) N8(2.4,-4.8) N9(3.2,-4.8)
